# Altium PCB LASERDIODE_FIX.PcbDoc (part 1 of 4)
Units mm, origin at the board's own origin, x right, y up, seen from the top; angles counter-clockwise.
Board outline 85 x 85 mm, 4 copper layers (Top Layer, Mid-Layer 1, Mid-Layer 2, Bottom Layer); 546 components, 363 nets, 1494 pads, 1079 vias.
Unrouted connection lines stored in the file: 1020.
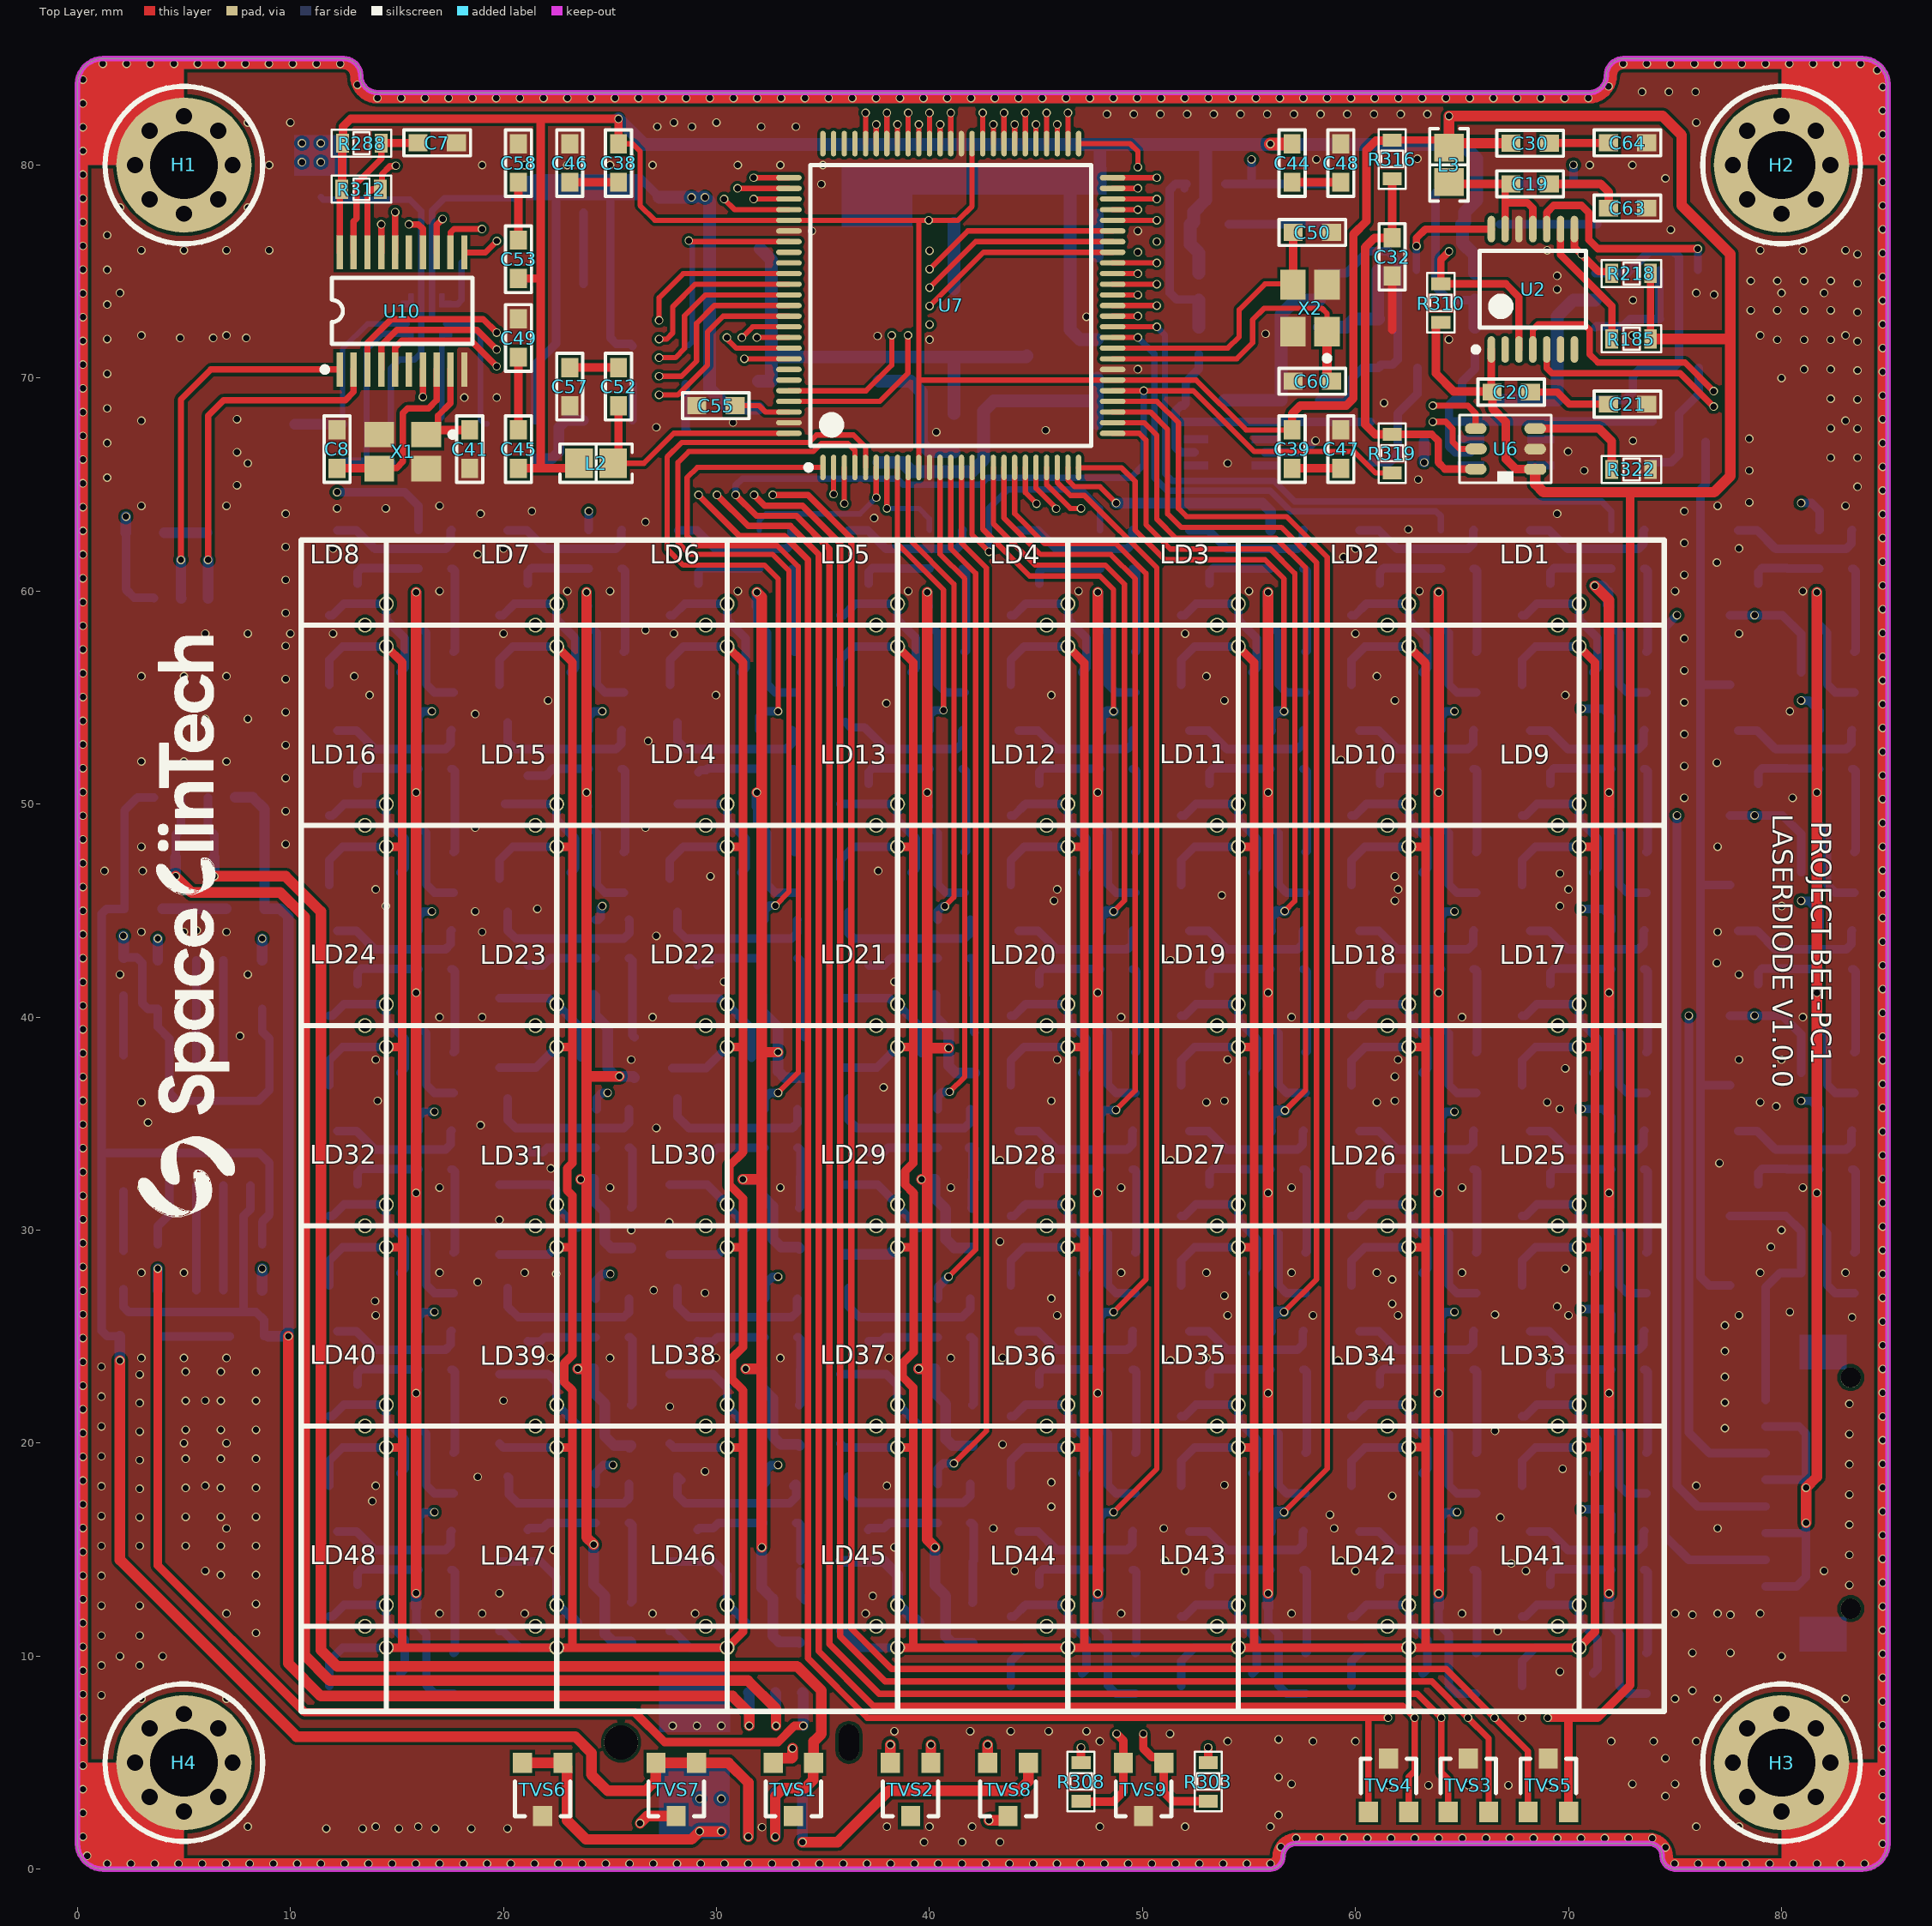
[diagram p0: Top Layer view]
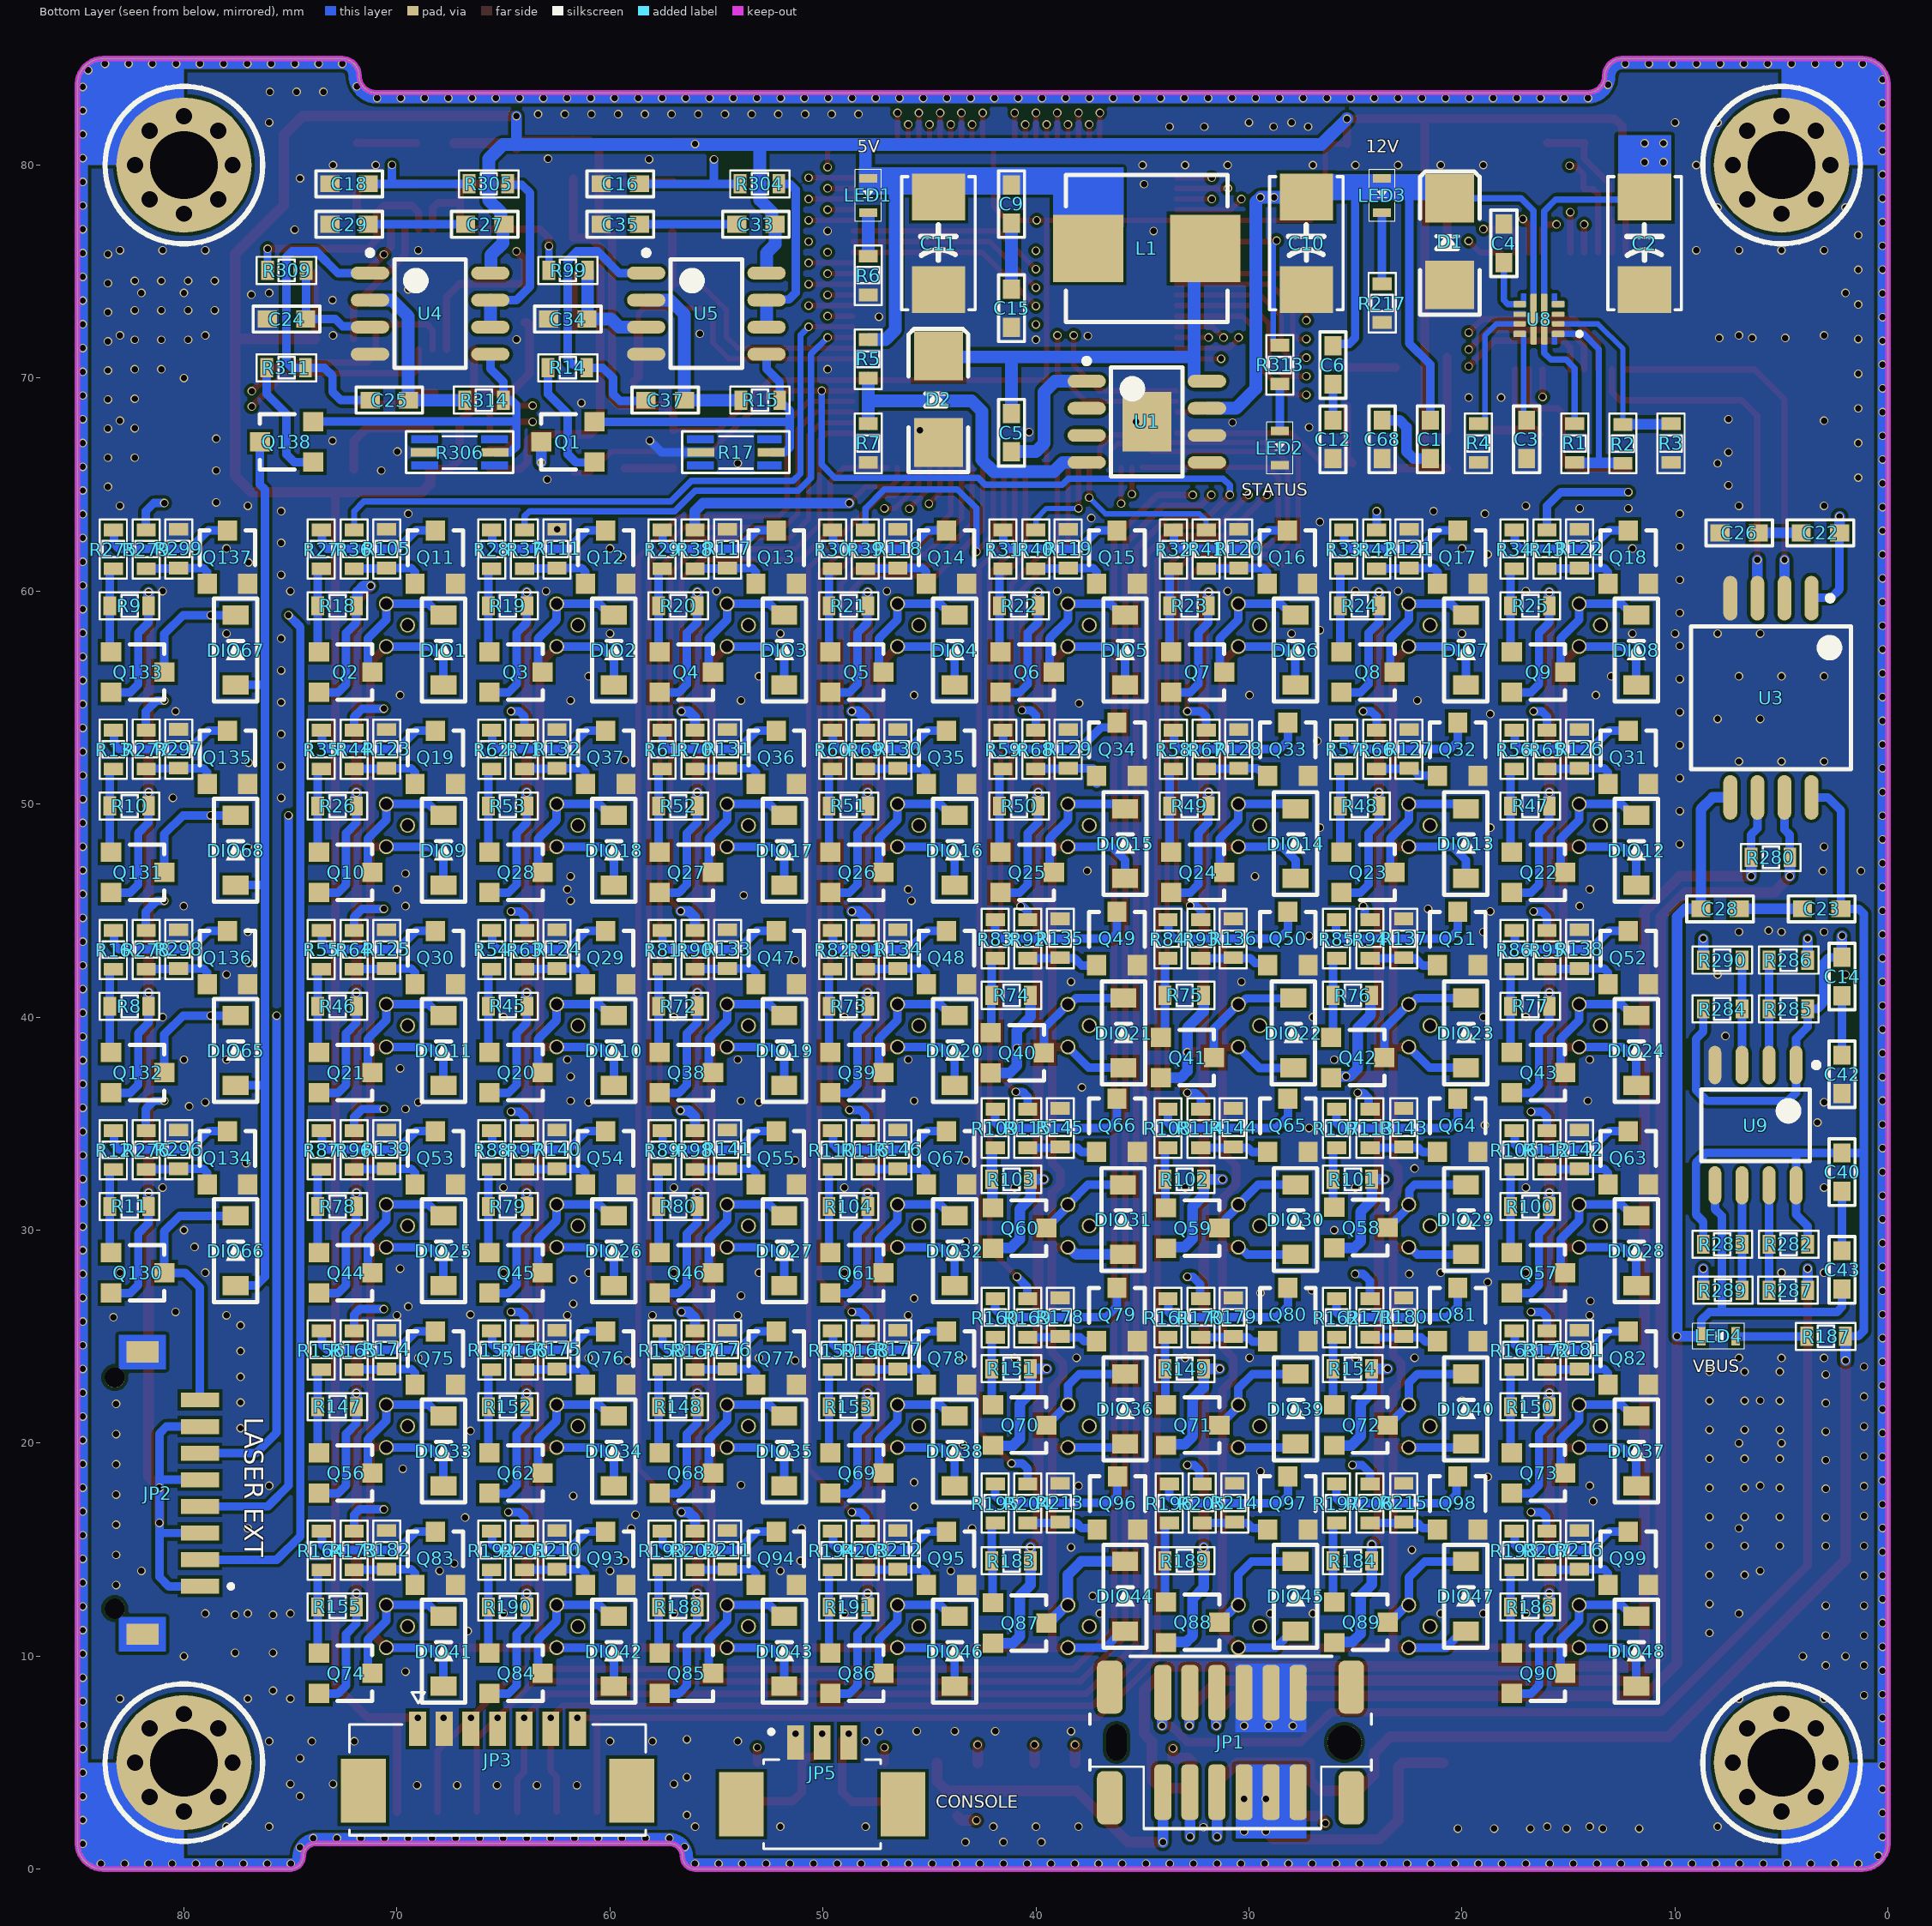
[diagram p1: Bottom Layer view, seen from below]
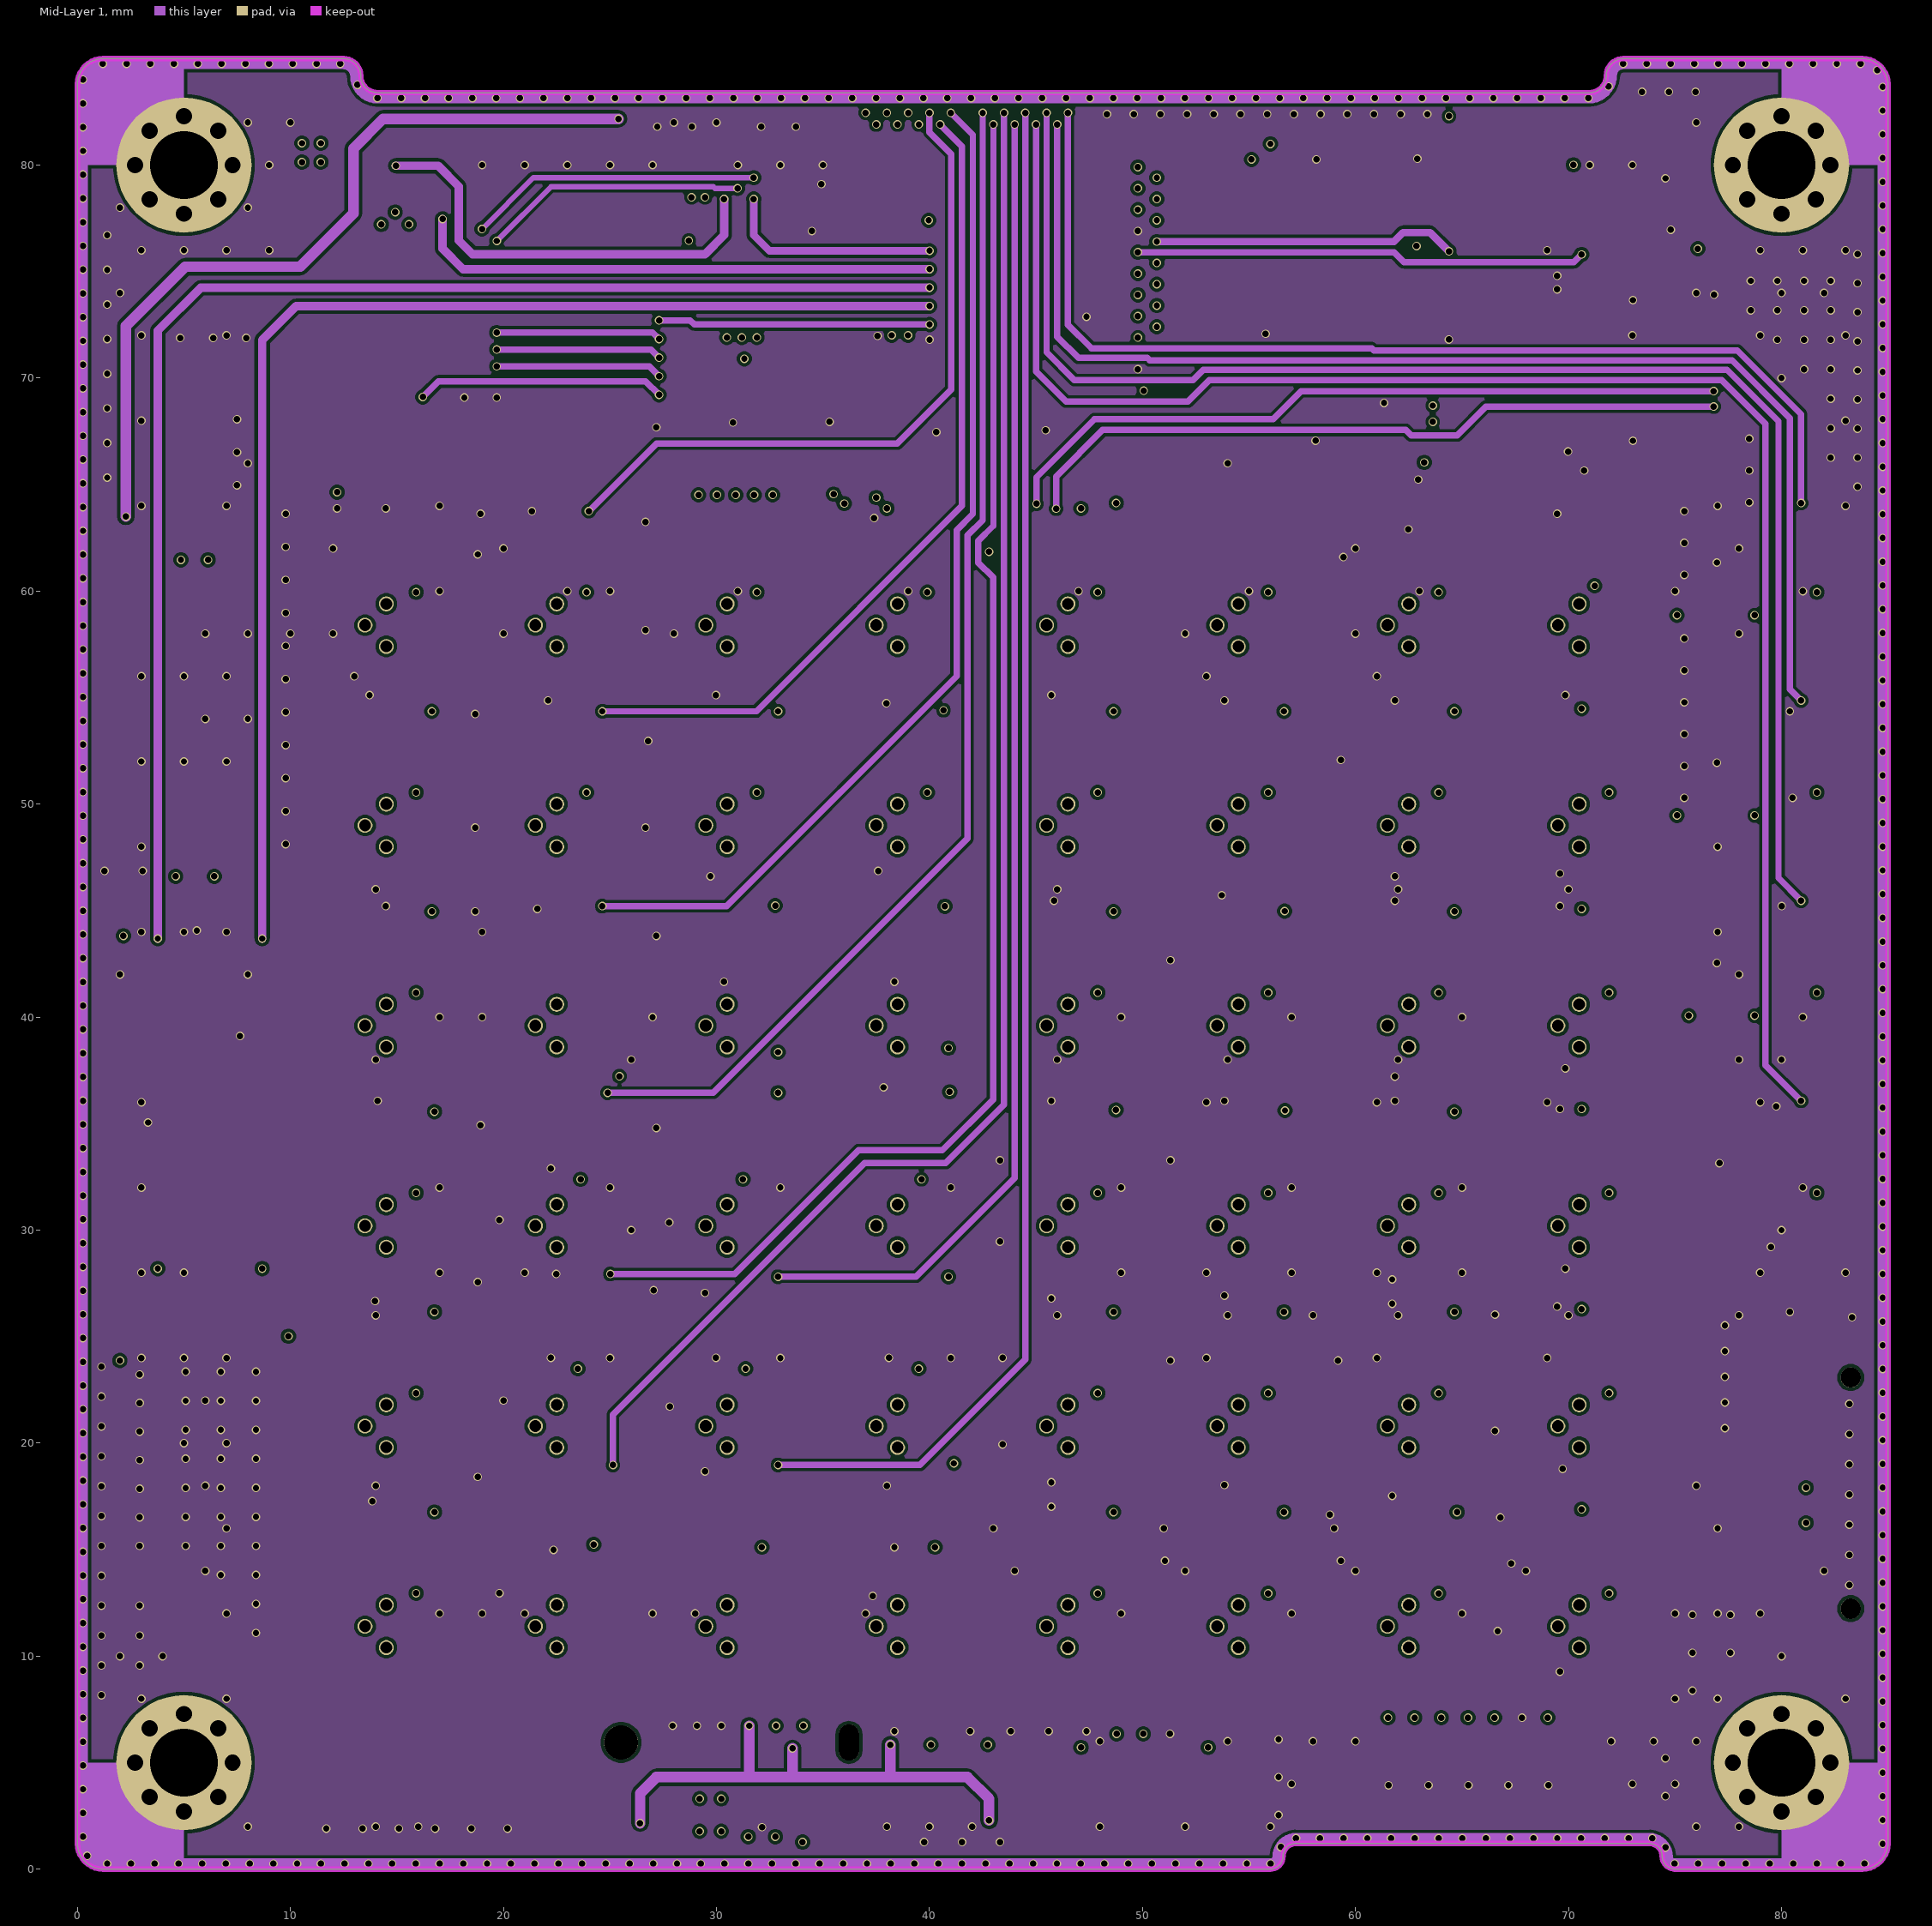
[diagram p2: Mid-Layer 1]
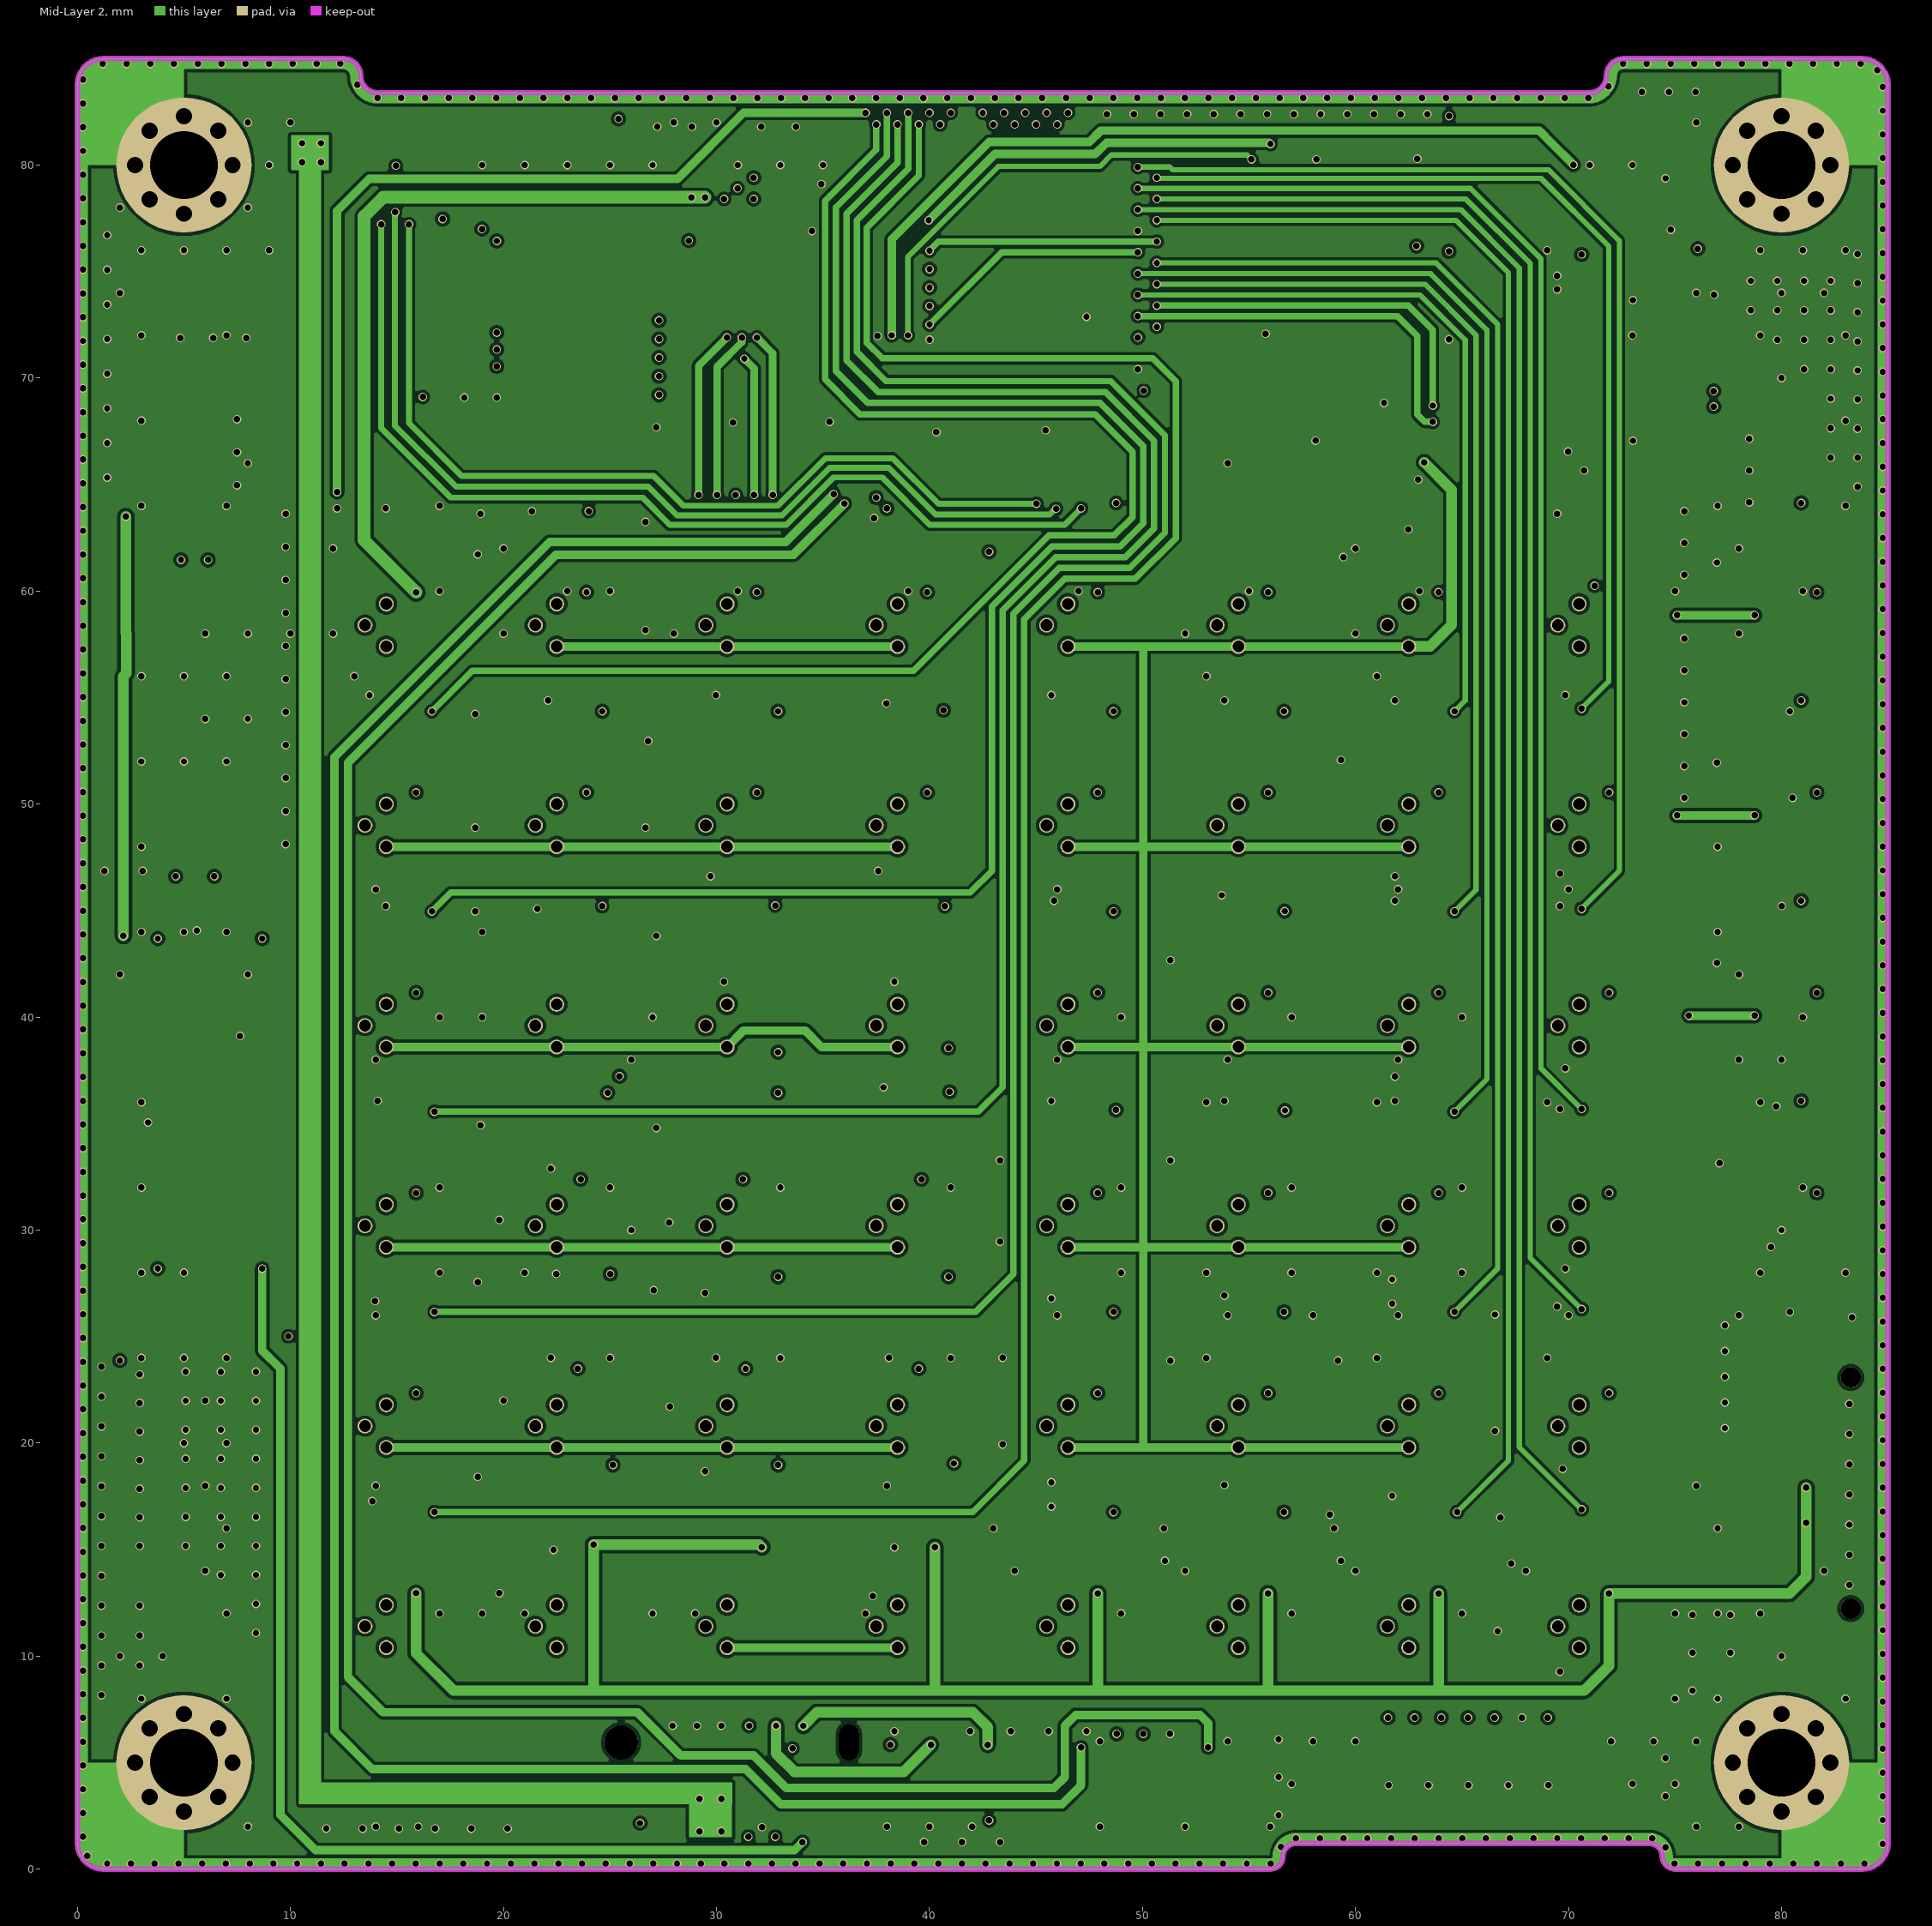
[diagram p3: Mid-Layer 2]
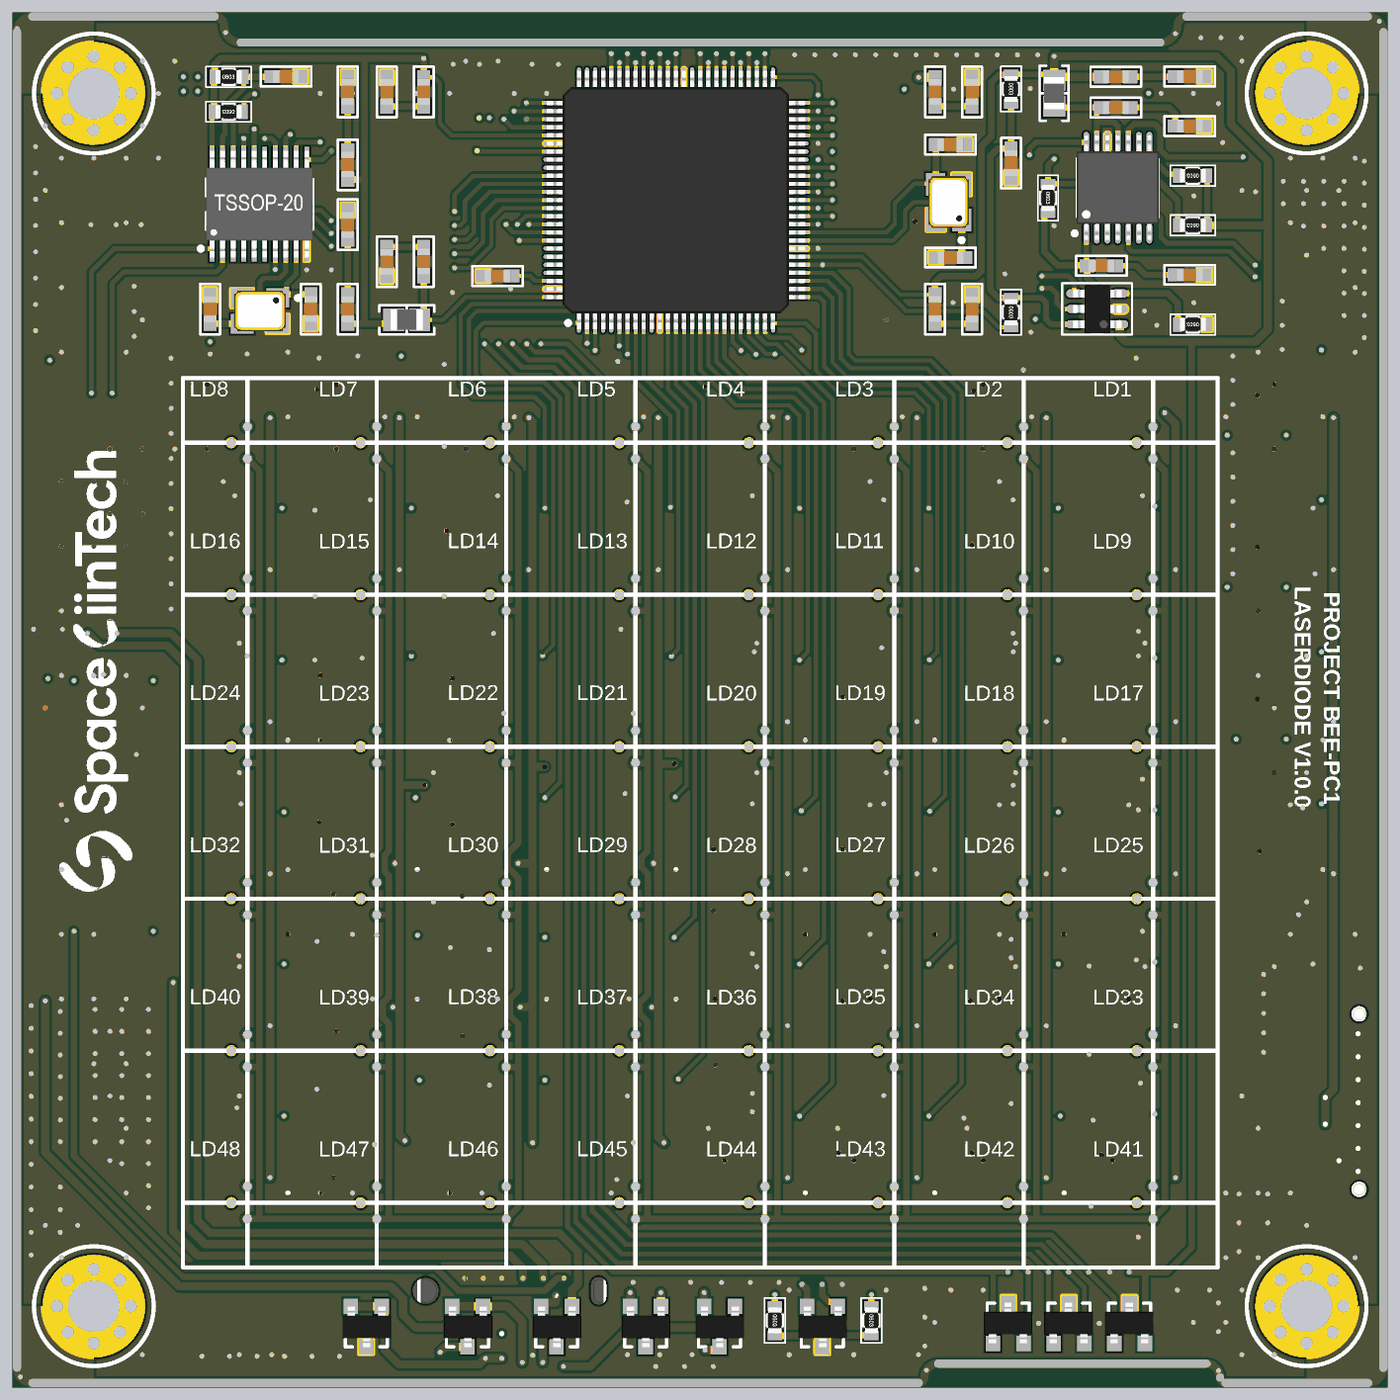
[diagram p7: 3D render of the assembled board from above, using the file's embedded part models]
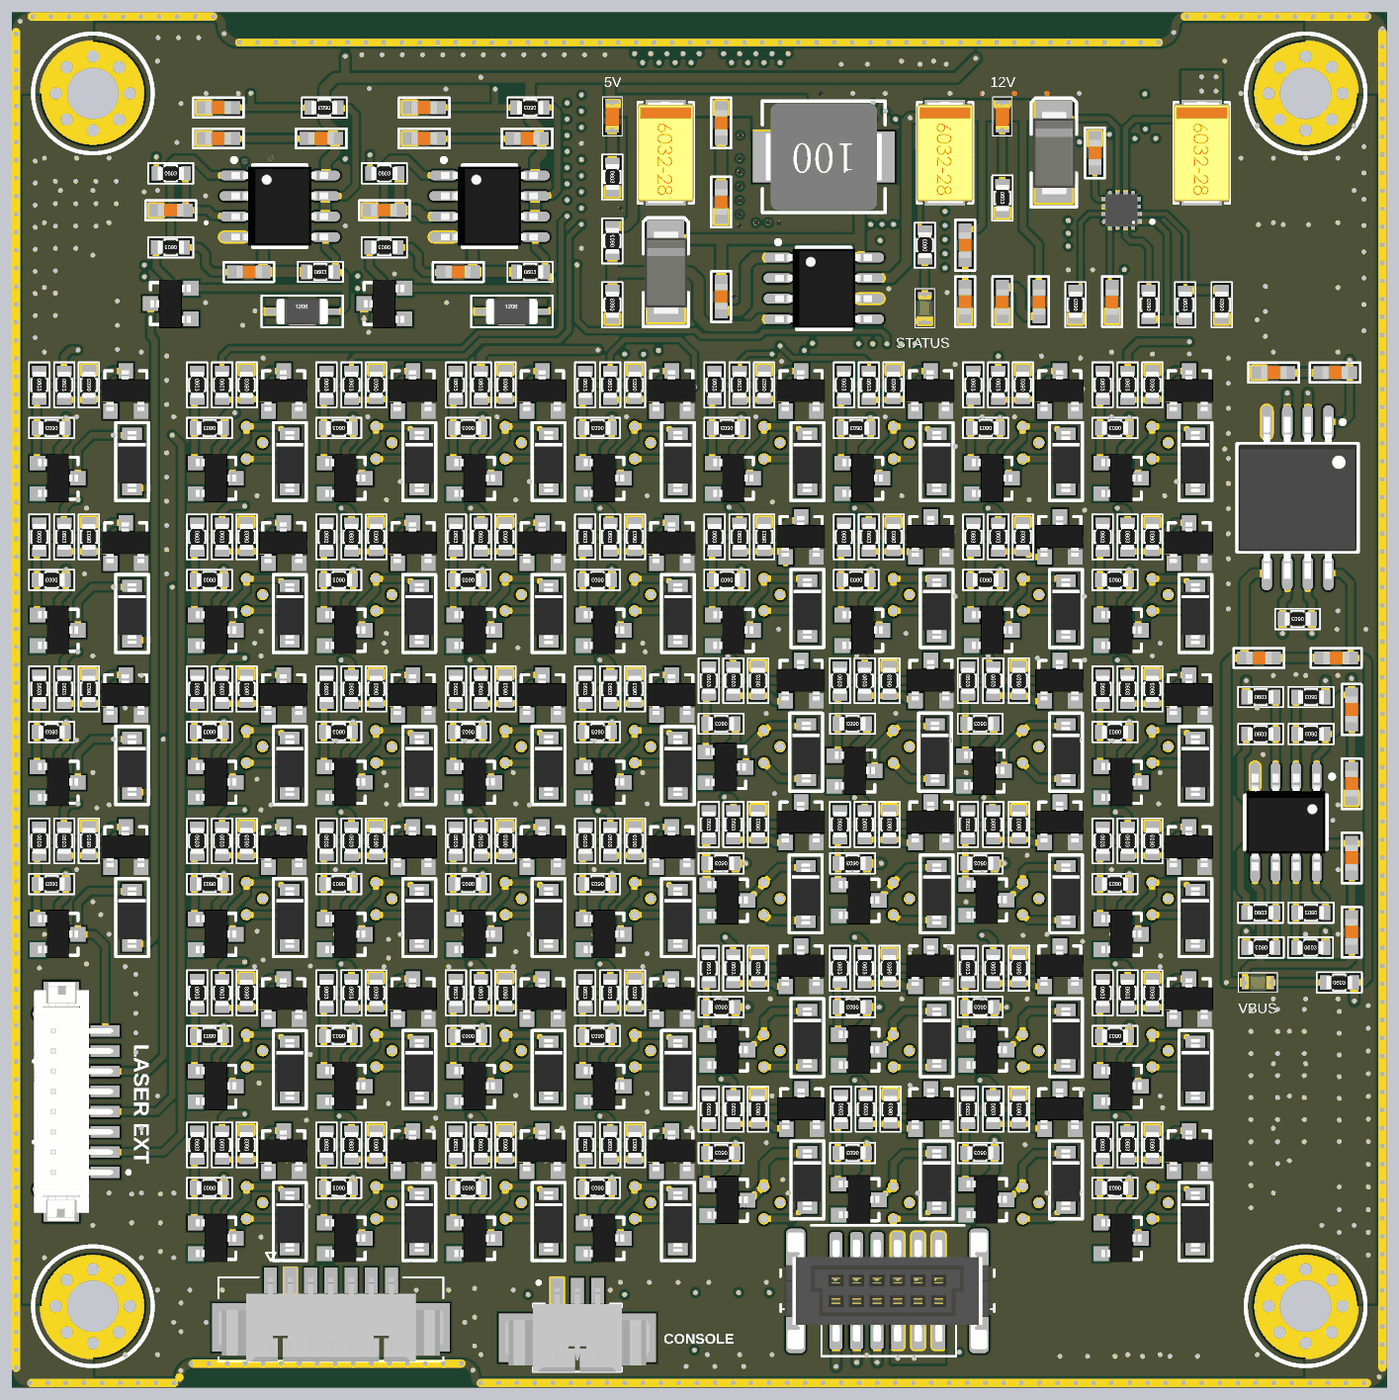
[diagram p8: 3D render of the assembled board from below, using the file's embedded part models]

## Layer stack, top to bottom
Top Solder: solder mask 0.0102, Solder Resist, Dk 3.5
Top Layer: signal copper 0.0356
Dielectric 1: dielectric 0.32, FR-4, Dk 4.8
Mid-Layer 1: signal copper 0.0356
Dielectric2: dielectric 0.32, FR-4, Dk 4.8
Mid-Layer 2: signal copper 0.0356
Dielectric3: dielectric 0.32, FR-4, Dk 4.8
Bottom Layer: signal copper 0.0356
Bottom Solder: solder mask 0.0102, Solder Resist, Dk 3.5

## Board outline
1.2,0 cw(c1.2,1.2) 0,1.2 0,83.8 cw(c1.2,83.8) 1.2,85 12.5,85 cw(c12.5,84.2) 13.3,84.2 ccw(c14.1,84.2) 14.1,83.4 56.673,83.4 56.675,83.398 70.975,83.398 ccw(c70.975,84.198) 71.775,84.198 cw(c72.575,84.198) 72.575,84.998 83.798,84.998 83.8,85 cw(c83.8,83.8) 85,83.8 85,1.2 cw(c83.8,1.2) 83.8,0 75,0 cw(c75,0.6) 74.4,0.6 ccw(c73.8,0.6) 73.8,1.2 57.2,1.2 ccw(c57.2,0.6) 56.6,0.6 cw(c56,0.6) 56,0 56.007,0

## Design rules (kind name [scope] priority, off if disabled: settings)
Clearance [NOT InNet('SHIELD') and NOT OnLayer('Keep-Out Layer')] p1: gap=0.15 ignorepadtopadclearanceinfootprint=FALSE except(0.12: SMDPad-SMDPad)
HoleSize [All] p1: absolutevalues=TRUE maxlimit=8 minlimit=0.025 maxpercent=80.000 minpercent=20.000
HoleToHoleClearance [All] p1: gap=0.15 allowstackedmicrovias=TRUE
MinimumSolderMaskSliver [All] p1: minsoldermaskwidth=0
PolygonConnect [All] p1: connectstyle=Direct reliefconductorwidth=0.254 reliefentries=4 polygonreliefangle="90 Angle" airgapwidth=0.254
RoutingVias [All] p1: holewidth=0.711 width=1.27 viastyle="Through Hole" minholewidth=0.711 minwidth=1.27 maxholewidth=0.711 maxwidth=1.27
SilkToSolderMaskClearance [IsPad] p1: minsilkscreentomaskgap=0 clearancetoexposedcopper=TRUE
SolderMaskExpansion [All] p1: expansion=0.102 istentingtop=FALSE
Width [All] p1: maxlimit=3 minlimit=0.2 preferedwidth=0.254 minimp=50.000000 maximp=50.000000 favimp=50.000000
26 further rules are at their usual default settings.

## Classes and differential pairs
component class MCU: C32 C38 C39 C44 C45 C46 C47 C48 C49 C50 C52 C53 C55 C57 C58 C60 JP3 JP5 L2 LED2 R303 R308 R313 R316 R319 R322 TVS3 TVS4 TVS5 TVS9 U6 U7 X2
component class SWITCHING: DIO1 DIO2 DIO3 DIO4 DIO5 DIO6 DIO7 DIO8 DIO9 DIO10 DIO11 DIO12 DIO13 DIO14 DIO15 DIO16 DIO17 DIO18 DIO19 DIO20 DIO21 DIO22 DIO23 DIO24 DIO25 DIO26 DIO27 DIO28 DIO29 DIO30 DIO31 DIO32 DIO65 DIO66 DIO67 DIO68 LD1 LD2 LD3 LD4 LD5 LD6 LD7 LD8 LD9 LD10 LD11 LD12 LD13 LD14 LD15 LD16 LD17 LD18 LD19 LD20 LD21 LD22 LD23 LD24 LD25 LD26 LD27 LD28 LD29 LD30 LD31 LD32 Q2 Q3 Q4 Q5 Q6 Q7 Q8 Q9 Q10 Q11 Q12 Q13 Q14 Q15 Q16 Q17 Q18 Q19 Q20 Q21 Q22 Q23 Q24 Q25 Q26 Q27 Q28 Q29 Q30 Q31 Q32 Q33 Q34 Q35 Q36 Q37 Q38 Q39 Q40 Q41 Q42 Q43 Q44 Q45 Q46 Q47 Q48 Q49 Q50 Q51 Q52 Q53 Q54 Q55 Q57 Q58 Q59 Q60 Q61 Q63 Q64 Q65 Q66 Q67 Q130 Q131 Q132 Q133 Q134 Q135 Q136 Q137 R8 R9 R10 R11 R12 R13 R16 R18 R19 R20 R21 R22 R23 R24 R25 R26 R27 R28 R29 R30 R31 R32 R33 R34 R35 R36 R37 R38 R39 R40 R41 R42 R43 R44 R45 R46 R47 R48 R49 R50 R51 R52 R53 R54 R55 R56 R57 R58 R59 R60 R61 R62 R63 R64 R65 R66 R67 R68 R69 R70 R71 R72 R73 R74 R75 R76 R77 R78 R79 R80 R81 R82 R83 R84 R85 R86 R87 R88 R89 R90 R91 R92 R93 R94 R95 R96 R97 R98 R100 R101 R102 R103 R104 R105 R106 R107 R108 R109 R110 R111 R112 R113 R114 R115 R116 R117 R118 R119 R120 R121 R122 R123 R124 R125 R126 R127 R128 R129 R130 R131 R132 R133 R134 R135 R136 R137 R138 R139 R140 R141 R142 R143 R144 R145 R146 R275 R276 R277 R278 R279 R296 R297 R298 R299
component class "SWITCHING (CONT)": DIO33 DIO34 DIO35 DIO36 DIO37 DIO38 DIO39 DIO40 DIO41 DIO42 DIO43 DIO44 DIO45 DIO46 DIO47 DIO48 LD33 LD34 LD35 LD36 LD37 LD38 LD39 LD40 LD41 LD42 LD43 LD44 LD45 LD46 LD47 LD48 Q56 Q62 Q68 Q69 Q70 Q71 Q72 Q73 Q74 Q75 Q76 Q77 Q78 Q79 Q80 Q81 Q82 Q83 Q84 Q85 Q86 Q87 Q88 Q89 Q90 Q93 Q94 Q95 Q96 Q97 Q98 Q99 R147 R148 R149 R150 R151 R152 R153 R154 R155 R156 R157 R158 R159 R160 R161 R162 R163 R164 R165 R166 R167 R168 R169 R170 R171 R172 R173 R174 R175 R176 R177 R178 R179 R180 R181 R182 R183 R184 R186 R188 R189 R190 R191 R192 R193 R194 R195 R196 R197 R198 R201 R202 R203 R204 R205 R206 R207 R210 R211 R212 R213 R214 R215 R216
component class EFUSE_AND_REGULATOR: C1 C2 C3 C4 C5 C6 C9 C10 C11 C12 C15 C68 D1 D2 L1 LED1 LED3 R1 R2 R3 R4 R5 R6 R7 R217 U1 U8
component class CURRENT_SOURCE: C16 C18 C24 C25 C27 C29 C33 C34 C35 C37 Q1 Q138 R14 R15 R17 R99 R304 R305 R306 R309 R311 R314 U4 U5
component class COMMUNICATION: C7 C8 C14 C19 C20 C21 C22 C23 C26 C28 C30 C40 C41 C42 C43 C63 C64 H1 H2 H3 H4 JP1 JP2 L3 LED4 R185 R187 R218 R280 R282 R283 R284 R285 R286 R287 R288 R289 R290 R310 R312 TVS1 TVS2 TVS6 TVS7 TVS8 U2 U3 U9 U10 X1

## Components (designator, comment, footprint, x,y, rotation, side; value= is the part's Value field where it differs from the comment)
C1 "0.22uF/25V" SM-0603 21.488,67.12 r90 bottom value=103
C2 "100uF/16V" "TANT 2312" 11.43,76.327 r270 bottom
C3 "2.2nF/25V" SM-0603 16.967,67.12 r90 bottom value=103
C4 "2.2nF/25V" SM-0603 18.034,76.327 r270 bottom value=103
C5 "0.01uF/25V" SM-0603 41.148,67.437 r270 bottom value=103
C6 "0.22uF/25V" SM-0603 26.06,70.612 r270 bottom value=103
C7 "0.22uF/25V" SM-0603 16.891,81.045 r0 top value=103
C8 "12pF/25V" SM-0603 12.192,66.664 r90 top value=103
C9 "0.22uF/25V" SM-0603 41.148,78.168 r270 bottom value=103
C10 "100uF/16V" "TANT 2312" 27.305,76.327 r270 bottom
C11 "100uF/16V" "TANT 2312" 44.577,76.327 r270 bottom
C12 "0.22uF/25V" SM-0603 26.06,67.12 r270 bottom value=103
C14 "0.22uF/25V" SM-0603 2.159,41.905 r270 bottom value=103
C15 "0.22uF/25V" SM-0603 41.148,73.279 r270 bottom value=103
C16 "470pF/50V" SM-0603 59.514,79.122 r180 bottom value=103
C18 "470pF/50V" SM-0603 72.242,79.122 r180 bottom value=103
C19 "0.22uF/25V" SM-0603 68.199,79.121 r180 top value=103
C20 "0.22uF/25V" SM-0603 67.31,69.342 r180 top value=103
C21 "0.22uF/25V" SM-0603 72.771,68.779 r180 top value=103
C22 "0.22uF/25V" SM-0603 3.175,62.736 r0 bottom value=103
C23 "0.22uF/25V" SM-0603 3.111,45.085 r0 bottom value=103
C24 "470pF/50V" SM-0603 75.184,72.771 r180 bottom value=103
C25 "0.1uF/25V" SM-0603 70.358,68.961 r0 bottom value=103
C26 "0.22uF/25V" SM-0603 6.985,62.736 r0 bottom value=103
C27 "0.22uF/25V" SM-0603 65.878,77.216 r180 bottom value=103
C28 "0.22uF/25V" SM-0603 7.885,45.085 r0 bottom value=103
C29 "0.22uF/25V" SM-0603 72.242,77.216 r180 bottom value=103
C30 "0.22uF/25V" SM-0603 68.199,81.026 r180 top value=103
C32 "0.22uF/25V" SM-0603 61.722,75.692 r270 top value=103
C33 "0.22uF/25V" SM-0603 53.15,77.216 r180 bottom value=103
C34 "470pF/50V" SM-0603 61.976,72.771 r180 bottom value=103
C35 "0.22uF/25V" SM-0603 59.514,77.216 r180 bottom value=103
C37 "0.1uF/25V" SM-0603 57.404,68.961 r0 bottom value=103
C38 "0.22uF/25V" SM-0603 25.4,80.093 r270 top value=103
C39 "0.22uF/25V" SM-0603 57.023,66.664 r270 top value=103
C40 "0.22uF/25V" SM-0603 2.159,32.723 r270 bottom value=103
C41 "12pF/25V" SM-0603 18.415,66.664 r270 top value=103
C42 "0.22uF/25V" SM-0603 2.159,37.314 r270 bottom value=103
C43 "0.22uF/25V" SM-0603 2.159,28.131 r270 bottom value=103
C44 "0.22uF/25V" SM-0603 57.023,80.093 r270 top value=103
C45 "0.22uF/25V" SM-0603 20.701,66.664 r90 top value=103
C46 "0.22uF/25V" SM-0603 23.114,80.093 r90 top value=103
C47 "0.22uF/25V" SM-0603 59.309,66.664 r90 top value=103
C48 "0.22uF/25V" SM-0603 59.309,80.093 r90 top value=103
C49 "0.22uF/25V" SM-0603 20.701,71.882 r90 top value=103
C50 "12pF/25V" SM-0603 57.975,76.835 r0 top value=103
C52 "0.22uF/25V" SM-0603 25.4,69.596 r270 top value=103
C53 "0.22uF/25V" SM-0603 20.701,75.576 r270 top value=103
C55 "0.22uF/25V" SM-0603 29.972,68.707 r0 top value=103
C57 "0.22uF/25V" SM-0603 23.114,69.596 r90 top value=103
C58 "0.22uF/25V" SM-0603 20.701,80.093 r270 top value=103
C60 "12pF/25V" SM-0603 57.975,69.85 r180 top value=103
C63 "0.22uF/25V" SM-0603 72.771,77.979 r180 top value=103
C64 "0.22uF/25V" SM-0603 72.771,81.045 r180 top value=103
C68 "0.22uF/25V" SM-0603 23.749,67.12 r90 bottom value=103
D1 "SS54" DIO-SMD-A 20.701,76.278 r270 bottom value=1N5007
D2 "SS54" DIO-SMD-A 44.704,68.884 r270 bottom value=1N5007
DIO1 "Diode SMD" SOD23 67.818,55.581 r90 bottom value=1N5007
DIO2 "Diode SMD" SOD23 59.818,55.581 r90 bottom value=1N5007
DIO3 "Diode SMD" SOD23 51.818,55.581 r90 bottom value=1N5007
DIO4 "Diode SMD" SOD23 43.818,55.581 r90 bottom value=1N5007
DIO5 "Diode SMD" SOD23 35.818,55.581 r90 bottom value=1N5007
DIO6 "Diode SMD" SOD23 27.818,55.581 r90 bottom value=1N5007
DIO7 "Diode SMD" SOD23 19.818,55.581 r90 bottom value=1N5007
DIO8 "Diode SMD" SOD23 11.818,55.581 r90 bottom value=1N5007
DIO9 "Diode SMD" SOD23 67.818,46.181 r90 bottom value=1N5007
DIO10 "Diode SMD" SOD23 59.818,36.781 r90 bottom value=1N5007
DIO11 "Diode SMD" SOD23 67.818,36.781 r90 bottom value=1N5007
DIO12 "Diode SMD" SOD23 11.818,46.181 r90 bottom value=1N5007
DIO13 "Diode SMD" SOD23 19.818,46.498 r90 bottom value=1N5007
DIO14 "Diode SMD" SOD23 27.813,46.498 r90 bottom value=1N5007
DIO15 "Diode SMD" SOD23 35.818,46.498 r90 bottom value=1N5007
DIO16 "Diode SMD" SOD23 43.818,46.181 r90 bottom value=1N5007
DIO17 "Diode SMD" SOD23 51.818,46.181 r90 bottom value=1N5007
DIO18 "Diode SMD" SOD23 59.818,46.181 r90 bottom value=1N5007
DIO19 "Diode SMD" SOD23 51.818,36.781 r90 bottom value=1N5007
DIO20 "Diode SMD" SOD23 43.818,36.781 r90 bottom value=1N5007
DIO21 "Diode SMD" SOD23 35.896,37.608 r90 bottom value=1N5007
DIO22 "Diode SMD" SOD23 27.918,37.608 r90 bottom value=1N5007
DIO23 "Diode SMD" SOD23 19.818,37.608 r90 bottom value=1N5007
DIO24 "Diode SMD" SOD23 11.818,36.781 r90 bottom value=1N5007
DIO25 "Diode SMD" SOD23 67.818,27.381 r90 bottom value=1N5007
DIO26 "Diode SMD" SOD23 59.818,27.381 r90 bottom value=1N5007
DIO27 "Diode SMD" SOD23 51.818,27.381 r90 bottom value=1N5007
DIO28 "Diode SMD" SOD23 11.818,27.381 r90 bottom value=1N5007
DIO29 "Diode SMD" SOD23 19.818,28.845 r90 bottom value=1N5007
DIO30 "Diode SMD" SOD23 27.813,28.845 r90 bottom value=1N5007
DIO31 "Diode SMD" SOD23 35.918,28.845 r90 bottom value=1N5007
DIO32 "Diode SMD" SOD23 43.818,27.381 r90 bottom value=1N5007
DIO33 "Diode SMD" SOD23 67.818,17.981 r90 bottom value=1N5007
DIO34 "Diode SMD" SOD23 59.818,17.981 r90 bottom value=1N5007
DIO35 "Diode SMD" SOD23 51.818,17.981 r90 bottom value=1N5007
DIO36 "Diode SMD" SOD23 35.818,19.955 r90 bottom value=1N5007
DIO37 "Diode SMD" SOD23 11.818,17.981 r90 bottom value=1N5007
DIO38 "Diode SMD" SOD23 43.818,17.981 r90 bottom value=1N5007
DIO39 "Diode SMD" SOD23 27.813,19.955 r90 bottom value=1N5007
DIO40 "Diode SMD" SOD23 19.818,19.955 r90 bottom value=1N5007
DIO41 "Diode SMD" SOD23 67.818,8.581 r90 bottom value=1N5007
DIO42 "Diode SMD" SOD23 59.818,8.581 r90 bottom value=1N5007
DIO43 "Diode SMD" SOD23 51.818,8.581 r90 bottom value=1N5007
DIO44 "Diode SMD" SOD23 35.818,11.16 r90 bottom value=1N5007
DIO45 "Diode SMD" SOD23 27.813,11.16 r90 bottom value=1N5007
DIO46 "Diode SMD" SOD23 43.818,8.581 r90 bottom value=1N5007
DIO47 "Diode SMD" SOD23 19.818,11.16 r90 bottom value=1N5007
DIO48 "Diode SMD" SOD23 11.818,8.581 r90 bottom value=1N5007
DIO65 "Diode SMD" SOD23 77.578,36.781 r90 bottom value=1N5007
DIO66 "Diode SMD" SOD23 77.578,27.381 r90 bottom value=1N5007
DIO67 "Diode SMD" SOD23 77.578,55.581 r90 bottom value=1N5007
DIO68 "Diode SMD" SOD23 77.578,46.182 r90 bottom value=1N5007
H1 "M3" M3 5,80 r0 top locked
H2 "M3" M3 80,80 r0 top locked
H3 "M3" M3 80,5 r0 top locked
H4 "M3" M3 5,5 r0 top locked
JP1 "JP6x2" M55-6001242R 30.868,5.948 r180 bottom locked
JP2 "LASER_EXTERNAL" M30-6000846 81.947,17.653 r90 bottom
JP3 "JTAG" 0532610771 65.278,4.191 r180 bottom locked
JP5 "CONSOLE" 0532610371 50.038,3.048 r180 bottom locked
L1 "15uH/3.5A" SRP7050TA 34.798,76.082 r0 bottom
L2 "10uH" "FER 0805/2012" 24.35,66.001 r180 top value=1.5uH
L3 "10uH" "FER 0805/2012" 64.389,80.01 r90 top value=1.5uH
LD1 "LaserDiode" LASER 70.5,58.4 r0 top
LD2 "LaserDiode" LASER 62.5,58.4 r0 top
LD3 "LaserDiode" LASER 54.5,58.4 r0 top
LD4 "LaserDiode" LASER 46.5,58.4 r0 top
LD5 "LaserDiode" LASER 38.5,58.4 r0 top
LD6 "LaserDiode" LASER 30.5,58.4 r0 top
LD7 "LaserDiode" LASER 22.5,58.4 r0 top
LD8 "LaserDiode" LASER 14.5,58.4 r0 top
LD9 "LaserDiode" LASER 70.5,49 r0 top
LD10 "LaserDiode" LASER 62.5,49 r0 top
LD11 "LaserDiode" LASER 54.5,49 r0 top
LD12 "LaserDiode" LASER 46.5,49 r0 top
LD13 "LaserDiode" LASER 38.5,49 r0 top
LD14 "LaserDiode" LASER 30.5,49 r0 top
LD15 "LaserDiode" LASER 22.5,49 r0 top
LD16 "LaserDiode" LASER 14.5,49 r0 top
LD17 "LaserDiode" LASER 70.5,39.6 r0 top
LD18 "LaserDiode" LASER 62.5,39.6 r0 top
LD19 "LaserDiode" LASER 54.5,39.6 r0 top
LD20 "LaserDiode" LASER 46.5,39.6 r0 top
LD21 "LaserDiode" LASER 38.5,39.6 r0 top
LD22 "LaserDiode" LASER 30.5,39.6 r0 top
LD23 "LaserDiode" LASER 22.5,39.6 r0 top
LD24 "LaserDiode" LASER 14.5,39.6 r0 top
LD25 "LaserDiode" LASER 70.5,30.2 r0 top
LD26 "LaserDiode" LASER 62.5,30.2 r0 top
LD27 "LaserDiode" LASER 54.5,30.2 r0 top
LD28 "LaserDiode" LASER 46.5,30.2 r0 top
LD29 "LaserDiode" LASER 38.5,30.2 r0 top
LD30 "LaserDiode" LASER 30.5,30.2 r0 top
LD31 "LaserDiode" LASER 22.5,30.2 r0 top
LD32 "LaserDiode" LASER 14.5,30.2 r0 top
LD33 "LaserDiode" LASER 70.5,20.8 r0 top
LD34 "LaserDiode" LASER 62.5,20.8 r0 top
LD35 "LaserDiode" LASER 54.5,20.8 r0 top
LD36 "LaserDiode" LASER 46.5,20.8 r0 top
LD37 "LaserDiode" LASER 38.5,20.8 r0 top
LD38 "LaserDiode" LASER 30.5,20.8 r0 top
LD39 "LaserDiode" LASER 22.5,20.8 r0 top
LD40 "LaserDiode" LASER 14.5,20.8 r0 top
LD41 "LaserDiode" LASER 70.5,11.4 r0 top
LD42 "LaserDiode" LASER 62.5,11.4 r0 top
LD43 "LaserDiode" LASER 54.5,11.4 r0 top
LD44 "LaserDiode" LASER 46.5,11.4 r0 top
LD45 "LaserDiode" LASER 38.5,11.4 r0 top
LD46 "LaserDiode" LASER 30.5,11.4 r0 top
LD47 "LaserDiode" LASER 22.5,11.4 r0 top
LD48 "LaserDiode" LASER 14.5,11.4 r0 top
LED1 "LED" REDLED_0603 47.879,78.572 r270 bottom value="LED 3 - 5 ly 2 Colour"
LED2 "LED_STATUS" GREENLED_0603 28.555,66.717 r270 bottom value="LED 3 - 5 ly 2 Colour"
LED3 "LED" REDLED_0603 23.754,78.572 r270 bottom value="LED 3 - 5 ly 2 Colour"
LED4 "LED_VBUS" GREENLED_0603 7.959,25.019 r0 bottom value="LED 3 - 5 ly 2 Colour"
Q1 "AO3400" SOT23-132 61.976,67.006 r90 bottom
Q2 "AO3401" SOT23-123 72.41,56.195 r270 bottom
Q3 "AO3401" SOT23-123 64.41,56.195 r270 bottom
Q4 "AO3401" SOT23-123 56.41,56.195 r270 bottom
Q5 "AO3401" SOT23-123 48.41,56.195 r270 bottom
Q6 "AO3401" SOT23-123 40.41,56.195 r270 bottom
Q7 "AO3401" SOT23-123 32.41,56.195 r270 bottom
Q8 "AO3401" SOT23-123 24.41,56.195 r270 bottom
Q9 "AO3401" SOT23-123 16.41,56.195 r270 bottom
Q10 "AO3401" SOT23-123 72.41,46.795 r270 bottom
Q11 "MMBT2222A" SOT23-132 68.199,61.595 r180 bottom value=C1815
Q12 "MMBT2222A" SOT23-132 60.199,61.595 r180 bottom value=C1815
Q13 "MMBT2222A" SOT23-132 52.199,61.595 r180 bottom value=C1815
Q14 "MMBT2222A" SOT23-132 44.199,61.595 r180 bottom value=C1815
Q15 "MMBT2222A" SOT23-132 36.199,61.595 r180 bottom value=C1815
Q16 "MMBT2222A" SOT23-132 28.199,61.595 r180 bottom value=C1815
Q17 "MMBT2222A" SOT23-132 20.199,61.595 r180 bottom value=C1815
Q18 "MMBT2222A" SOT23-132 12.199,61.595 r180 bottom value=C1815
Q19 "MMBT2222A" SOT23-132 68.199,52.195 r180 bottom value=C1815
Q20 "AO3401" SOT23-123 64.41,37.395 r270 bottom
Q21 "AO3401" SOT23-123 72.41,37.395 r270 bottom
Q22 "AO3401" SOT23-123 16.41,46.795 r270 bottom
Q23 "AO3401" SOT23-123 24.41,46.795 r270 bottom
Q24 "AO3401" SOT23-123 32.41,46.795 r270 bottom
Q25 "AO3401" SOT23-123 40.41,46.795 r270 bottom
Q26 "AO3401" SOT23-123 48.41,46.795 r270 bottom
Q27 "AO3401" SOT23-123 56.41,46.795 r270 bottom
Q28 "AO3401" SOT23-123 64.41,46.795 r270 bottom
Q29 "MMBT2222A" SOT23-132 60.199,42.795 r180 bottom value=C1815
Q30 "MMBT2222A" SOT23-132 68.199,42.795 r180 bottom value=C1815
Q31 "MMBT2222A" SOT23-132 12.199,52.195 r180 bottom value=C1815
Q32 "MMBT2222A" SOT23-132 20.199,52.578 r180 bottom value=C1815
Q33 "MMBT2222A" SOT23-132 28.173,52.578 r180 bottom value=C1815
Q34 "MMBT2222A" SOT23-132 36.199,52.578 r180 bottom value=C1815
Q35 "MMBT2222A" SOT23-132 44.199,52.195 r180 bottom value=C1815
Q36 "MMBT2222A" SOT23-132 52.199,52.195 r180 bottom value=C1815
Q37 "MMBT2222A" SOT23-132 60.199,52.195 r180 bottom value=C1815
Q38 "AO3401" SOT23-123 56.41,37.395 r270 bottom
Q39 "AO3401" SOT23-123 48.41,37.395 r270 bottom
Q40 "AO3401" SOT23-123 40.875,38.32 r270 bottom
Q41 "AO3401" SOT23-123 32.893,38.1 r270 bottom
Q42 "AO3401" SOT23-123 24.898,38.105 r270 bottom
Q43 "AO3401" SOT23-123 16.41,37.395 r270 bottom
Q44 "AO3401" SOT23-123 72.41,27.995 r270 bottom
Q45 "AO3401" SOT23-123 64.41,27.995 r270 bottom
Q46 "AO3401" SOT23-123 56.41,27.995 r270 bottom
Q47 "MMBT2222A" SOT23-132 52.199,42.795 r180 bottom value=C1815
Q48 "MMBT2222A" SOT23-132 44.199,42.795 r180 bottom value=C1815
Q49 "MMBT2222A" SOT23-132 36.199,43.688 r180 bottom value=C1815
Q50 "MMBT2222A" SOT23-132 28.173,43.688 r180 bottom value=C1815
Q51 "MMBT2222A" SOT23-132 20.199,43.688 r180 bottom value=C1815
Q52 "MMBT2222A" SOT23-132 12.199,42.795 r180 bottom value=C1815
Q53 "MMBT2222A" SOT23-132 68.199,33.395 r180 bottom value=C1815
Q54 "MMBT2222A" SOT23-132 60.199,33.395 r180 bottom value=C1815
Q55 "MMBT2222A" SOT23-132 52.199,33.395 r180 bottom value=C1815
Q56 "AO3401" SOT23-123 72.41,18.595 r270 bottom
Q57 "AO3401" SOT23-123 16.41,27.995 r270 bottom
Q58 "AO3401" SOT23-123 24.745,30.12 r270 bottom
Q59 "AO3401" SOT23-123 32.639,30.099 r270 bottom
Q60 "AO3401" SOT23-123 40.767,30.099 r270 bottom
Q61 "AO3401" SOT23-123 48.41,27.995 r270 bottom
Q62 "AO3401" SOT23-123 64.41,18.595 r270 bottom
Q63 "MMBT2222A" SOT23-132 12.199,33.395 r180 bottom value=C1815
Q64 "MMBT2222A" SOT23-132 20.199,34.925 r180 bottom value=C1815
Q65 "MMBT2222A" SOT23-132 28.173,34.925 r180 bottom value=C1815
Q66 "MMBT2222A" SOT23-132 36.199,34.925 r180 bottom value=C1815
Q67 "MMBT2222A" SOT23-132 44.199,33.395 r180 bottom value=C1815
Q68 "AO3401" SOT23-123 56.41,18.595 r270 bottom
Q69 "AO3401" SOT23-123 48.41,18.595 r270 bottom
Q70 "AO3401" SOT23-123 40.767,20.843 r270 bottom
Q71 "AO3401" SOT23-123 32.639,20.843 r270 bottom
Q72 "AO3401" SOT23-123 24.745,20.843 r270 bottom
Q73 "AO3401" SOT23-123 16.41,18.595 r270 bottom
Q74 "AO3401" SOT23-123 72.41,9.195 r270 bottom
Q75 "MMBT2222A" SOT23-132 68.199,23.995 r180 bottom value=C1815
Q76 "MMBT2222A" SOT23-132 60.199,23.995 r180 bottom value=C1815
Q77 "MMBT2222A" SOT23-132 52.199,23.995 r180 bottom value=C1815
Q78 "MMBT2222A" SOT23-132 44.199,23.995 r180 bottom value=C1815
Q79 "MMBT2222A" SOT23-132 36.199,26.035 r180 bottom value=C1815
Q80 "MMBT2222A" SOT23-132 28.173,26.035 r180 bottom value=C1815
Q81 "MMBT2222A" SOT23-132 20.199,26.035 r180 bottom value=C1815
Q82 "MMBT2222A" SOT23-132 12.199,23.995 r180 bottom value=C1815
Q83 "MMBT2222A" SOT23-132 68.199,14.595 r180 bottom value=C1815
Q84 "AO3401" SOT23-123 64.41,9.195 r270 bottom
Q85 "AO3401" SOT23-123 56.41,9.195 r270 bottom
Q86 "AO3401" SOT23-123 48.41,9.195 r270 bottom
Q87 "AO3401" SOT23-123 40.767,11.557 r270 bottom
Q88 "AO3401" SOT23-123 32.639,11.587 r270 bottom
Q89 "AO3401" SOT23-123 24.745,11.587 r270 bottom
Q90 "AO3401" SOT23-123 16.41,9.195 r270 bottom
Q93 "MMBT2222A" SOT23-132 60.199,14.595 r180 bottom value=C1815
Q94 "MMBT2222A" SOT23-132 52.199,14.595 r180 bottom value=C1815
Q95 "MMBT2222A" SOT23-132 44.199,14.595 r180 bottom value=C1815
Q96 "MMBT2222A" SOT23-132 36.176,17.187 r180 bottom value=C1815
Q97 "MMBT2222A" SOT23-132 28.173,17.187 r180 bottom value=C1815
Q98 "MMBT2222A" SOT23-132 20.199,17.187 r180 bottom value=C1815
Q99 "MMBT2222A" SOT23-132 12.199,14.595 r180 bottom value=C1815
Q130 "AO3401" SOT23-123 82.17,27.995 r270 bottom
Q131 "AO3401" SOT23-123 82.17,46.796 r270 bottom
Q132 "AO3401" SOT23-123 82.17,37.395 r270 bottom
Q133 "AO3401" SOT23-123 82.17,56.195 r270 bottom
Q134 "MMBT2222A" SOT23-132 77.959,33.395 r180 bottom value=C1815
Q135 "MMBT2222A" SOT23-132 77.959,52.196 r180 bottom value=C1815
Q136 "MMBT2222A" SOT23-132 77.959,42.795 r180 bottom value=C1815
Q137 "MMBT2222A" SOT23-132 77.959,61.595 r180 bottom value=C1815
Q138 "AO3400" SOT23-132 75.184,67.006 r90 bottom
R1 "470K 1%" RES-SMD-0603 14.706,66.929 r90 bottom
R2 "11K 1%" RES-SMD-0603 12.445,66.929 r270 bottom
R3 "47K 1%" RES-SMD-0603 10.185,66.929 r90 bottom
R4 "549R 1%" RES-SMD-0603 19.227,66.929 r90 bottom
R5 "10K 1%" RES-SMD-0603 47.874,70.881 r90 bottom
R6 "1K 1%" RES-SMD-0603 47.874,74.832 r270 bottom
R7 "3.24K 0.1%" RES-SMD-0603 47.874,66.929 r90 bottom
R8 "10K 1%" RES-SMD-0603 82.55,40.509 r0 bottom
R9 "10K 1%" RES-SMD-0603 82.55,59.309 r0 bottom
R10 "10K 1%" RES-SMD-0603 82.55,49.91 r0 bottom
R11 "10K 1%" RES-SMD-0603 82.55,31.109 r0 bottom
R12 "10K 1%" RES-SMD-0603 83.312,33.775 r270 bottom
R13 "10K 1%" RES-SMD-0603 83.312,52.576 r270 bottom
R14 "100R 1%" RES-SMD-0603 61.976,70.484 r0 bottom
R15 "1K 1%" RES-SMD-0603 52.959,68.961 r180 bottom
R16 "10K 1%" RES-SMD-0603 83.312,43.175 r270 bottom
R17 "30R 1%" RES-SMD-1206 54.09,66.511 r180 bottom
R18 "10K 1%" RES-SMD-0603 72.79,59.309 r0 bottom
R19 "10K 1%" RES-SMD-0603 64.79,59.309 r0 bottom
R20 "10K 1%" RES-SMD-0603 56.79,59.309 r0 bottom
R21 "10K 1%" RES-SMD-0603 48.79,59.309 r0 bottom
R22 "10K 1%" RES-SMD-0603 40.79,59.309 r0 bottom
R23 "10K 1%" RES-SMD-0603 32.79,59.309 r0 bottom
R24 "10K 1%" RES-SMD-0603 24.79,59.309 r0 bottom
R25 "10K 1%" RES-SMD-0603 16.79,59.309 r0 bottom
R26 "10K 1%" RES-SMD-0603 72.79,49.909 r0 bottom
R27 "10K 1%" RES-SMD-0603 73.552,61.975 r270 bottom
R28 "10K 1%" RES-SMD-0603 65.552,61.975 r270 bottom
R29 "10K 1%" RES-SMD-0603 57.552,61.975 r270 bottom
R30 "10K 1%" RES-SMD-0603 49.552,61.975 r270 bottom
R31 "10K 1%" RES-SMD-0603 41.552,61.975 r270 bottom
R32 "10K 1%" RES-SMD-0603 33.552,61.975 r270 bottom
R33 "10K 1%" RES-SMD-0603 25.552,61.975 r270 bottom
R34 "10K 1%" RES-SMD-0603 17.552,61.975 r270 bottom
R35 "10K 1%" RES-SMD-0603 73.552,52.575 r270 bottom
R36 "1K 1%" RES-SMD-0603 72.009,61.975 r270 bottom
R37 "1K 1%" RES-SMD-0603 64.009,61.975 r270 bottom
R38 "1K 1%" RES-SMD-0603 56.009,61.975 r270 bottom
R39 "1K 1%" RES-SMD-0603 48.009,61.975 r270 bottom
R40 "1K 1%" RES-SMD-0603 40.009,61.975 r270 bottom
R41 "1K 1%" RES-SMD-0603 32.009,61.975 r270 bottom
R42 "1K 1%" RES-SMD-0603 24.009,61.975 r270 bottom
R43 "1K 1%" RES-SMD-0603 16.009,61.975 r270 bottom
R44 "1K 1%" RES-SMD-0603 72.009,52.575 r270 bottom
R45 "10K 1%" RES-SMD-0603 64.79,40.509 r0 bottom
R46 "10K 1%" RES-SMD-0603 72.79,40.509 r0 bottom
R47 "10K 1%" RES-SMD-0603 16.79,49.909 r0 bottom
R48 "10K 1%" RES-SMD-0603 24.79,49.909 r0 bottom
R49 "10K 1%" RES-SMD-0603 32.79,49.909 r0 bottom
R50 "10K 1%" RES-SMD-0603 40.79,49.909 r0 bottom
R51 "10K 1%" RES-SMD-0603 48.79,49.909 r0 bottom
R52 "10K 1%" RES-SMD-0603 56.79,49.909 r0 bottom
R53 "10K 1%" RES-SMD-0603 64.79,49.909 r0 bottom
R54 "10K 1%" RES-SMD-0603 65.552,43.175 r270 bottom
R55 "10K 1%" RES-SMD-0603 73.552,43.175 r270 bottom
R56 "10K 1%" RES-SMD-0603 17.552,52.575 r270 bottom
R57 "10K 1%" RES-SMD-0603 25.552,52.575 r270 bottom
R58 "10K 1%" RES-SMD-0603 33.552,52.575 r270 bottom
R59 "10K 1%" RES-SMD-0603 41.552,52.575 r270 bottom
R60 "10K 1%" RES-SMD-0603 49.552,52.575 r270 bottom
R61 "10K 1%" RES-SMD-0603 57.552,52.575 r270 bottom
R62 "10K 1%" RES-SMD-0603 65.552,52.575 r270 bottom
R63 "1K 1%" RES-SMD-0603 64.009,43.175 r270 bottom
R64 "1K 1%" RES-SMD-0603 72.009,43.175 r270 bottom
R65 "1K 1%" RES-SMD-0603 16.009,52.575 r270 bottom
R66 "1K 1%" RES-SMD-0603 24.009,52.575 r270 bottom
R67 "1K 1%" RES-SMD-0603 32.009,52.575 r270 bottom
R68 "1K 1%" RES-SMD-0603 40.009,52.575 r270 bottom
R69 "1K 1%" RES-SMD-0603 48.009,52.575 r270 bottom
R70 "1K 1%" RES-SMD-0603 56.009,52.575 r270 bottom
R71 "1K 1%" RES-SMD-0603 64.009,52.575 r270 bottom
R72 "10K 1%" RES-SMD-0603 56.79,40.509 r0 bottom
R73 "10K 1%" RES-SMD-0603 48.79,40.509 r0 bottom
R74 "10K 1%" RES-SMD-0603 41.147,41.021 r0 bottom
R75 "10K 1%" RES-SMD-0603 33.02,41.021 r0 bottom
R76 "10K 1%" RES-SMD-0603 25.125,41.021 r0 bottom
R77 "10K 1%" RES-SMD-0603 16.79,40.509 r0 bottom
R78 "10K 1%" RES-SMD-0603 72.79,31.109 r0 bottom
R79 "10K 1%" RES-SMD-0603 64.79,31.109 r0 bottom
R80 "10K 1%" RES-SMD-0603 56.79,31.109 r0 bottom
R81 "10K 1%" RES-SMD-0603 57.552,43.175 r270 bottom
R82 "10K 1%" RES-SMD-0603 49.552,43.175 r270 bottom
R83 "10K 1%" RES-SMD-0603 41.909,43.683 r270 bottom
R84 "10K 1%" RES-SMD-0603 33.806,43.683 r270 bottom
R85 "10K 1%" RES-SMD-0603 25.887,43.683 r270 bottom
R86 "10K 1%" RES-SMD-0603 17.552,43.175 r270 bottom
R87 "10K 1%" RES-SMD-0603 73.552,33.775 r270 bottom
R88 "10K 1%" RES-SMD-0603 65.552,33.775 r270 bottom
R89 "10K 1%" RES-SMD-0603 57.552,33.775 r270 bottom
R90 "1K 1%" RES-SMD-0603 56.009,43.175 r270 bottom
R91 "1K 1%" RES-SMD-0603 48.009,43.175 r270 bottom
R92 "1K 1%" RES-SMD-0603 40.385,43.683 r270 bottom
R93 "1K 1%" RES-SMD-0603 32.263,43.683 r270 bottom
R94 "1K 1%" RES-SMD-0603 24.318,43.683 r270 bottom
R95 "1K 1%" RES-SMD-0603 16.009,43.175 r270 bottom
R96 "1K 1%" RES-SMD-0603 72.009,33.775 r270 bottom
R97 "1K 1%" RES-SMD-0603 64.009,33.775 r270 bottom
R98 "1K 1%" RES-SMD-0603 56.009,33.775 r270 bottom
R99 "50R 1%" RES-SMD-0603 61.976,75.057 r180 bottom
R100 "10K 1%" RES-SMD-0603 16.79,31.109 r0 bottom
R101 "10K 1%" RES-SMD-0603 25.125,32.385 r0 bottom
R102 "10K 1%" RES-SMD-0603 33.02,32.385 r0 bottom
R103 "10K 1%" RES-SMD-0603 41.147,32.385 r0 bottom
R104 "10K 1%" RES-SMD-0603 48.79,31.109 r0 bottom
R105 "10K 1%" RES-SMD-0603 70.485,61.975 r90 bottom
R106 "10K 1%" RES-SMD-0603 17.552,33.775 r270 bottom
R107 "10K 1%" RES-SMD-0603 25.887,34.791 r270 bottom
R108 "10K 1%" RES-SMD-0603 33.806,34.791 r270 bottom
R109 "10K 1%" RES-SMD-0603 41.909,34.791 r270 bottom
R110 "10K 1%" RES-SMD-0603 49.552,33.775 r270 bottom
R111 "10K 1%" RES-SMD-0603 62.485,61.975 r90 bottom
R112 "1K 1%" RES-SMD-0603 16.009,33.775 r270 bottom
R113 "1K 1%" RES-SMD-0603 24.318,34.791 r270 bottom
R114 "1K 1%" RES-SMD-0603 32.263,34.791 r270 bottom
R115 "1K 1%" RES-SMD-0603 40.385,34.791 r270 bottom
R116 "1K 1%" RES-SMD-0603 48.009,33.775 r270 bottom
R117 "10K 1%" RES-SMD-0603 54.485,61.975 r90 bottom
R118 "10K 1%" RES-SMD-0603 46.485,61.975 r90 bottom
R119 "10K 1%" RES-SMD-0603 38.485,61.975 r90 bottom
R120 "10K 1%" RES-SMD-0603 30.485,61.975 r90 bottom
R121 "10K 1%" RES-SMD-0603 22.485,61.975 r90 bottom
R122 "10K 1%" RES-SMD-0603 14.485,61.975 r90 bottom
R123 "10K 1%" RES-SMD-0603 70.485,52.575 r90 bottom
R124 "10K 1%" RES-SMD-0603 62.485,43.175 r90 bottom
R125 "10K 1%" RES-SMD-0603 70.485,43.175 r90 bottom
R126 "10K 1%" RES-SMD-0603 14.485,52.575 r90 bottom
R127 "10K 1%" RES-SMD-0603 22.485,52.575 r90 bottom
R128 "10K 1%" RES-SMD-0603 30.485,52.575 r90 bottom
R129 "10K 1%" RES-SMD-0603 38.485,52.575 r90 bottom
R130 "10K 1%" RES-SMD-0603 46.485,52.575 r90 bottom
R131 "10K 1%" RES-SMD-0603 54.485,52.575 r90 bottom
R132 "10K 1%" RES-SMD-0603 62.485,52.575 r90 bottom
R133 "10K 1%" RES-SMD-0603 54.485,43.175 r90 bottom
R134 "10K 1%" RES-SMD-0603 46.485,43.175 r90 bottom
R135 "10K 1%" RES-SMD-0603 38.862,43.683 r90 bottom
R136 "10K 1%" RES-SMD-0603 30.739,43.683 r90 bottom
R137 "10K 1%" RES-SMD-0603 22.733,43.683 r90 bottom
R138 "10K 1%" RES-SMD-0603 14.485,43.175 r90 bottom
R139 "10K 1%" RES-SMD-0603 70.485,33.775 r90 bottom
R140 "10K 1%" RES-SMD-0603 62.485,33.775 r90 bottom
R141 "10K 1%" RES-SMD-0603 54.485,33.775 r90 bottom
R142 "10K 1%" RES-SMD-0603 14.485,33.775 r90 bottom
R143 "10K 1%" RES-SMD-0603 22.733,34.791 r90 bottom
R144 "10K 1%" RES-SMD-0603 30.739,34.791 r90 bottom
R145 "10K 1%" RES-SMD-0603 38.862,34.791 r90 bottom
R146 "10K 1%" RES-SMD-0603 46.485,33.775 r90 bottom
R147 "10K 1%" RES-SMD-0603 72.79,21.709 r0 bottom
R148 "10K 1%" RES-SMD-0603 56.79,21.709 r0 bottom
R149 "10K 1%" RES-SMD-0603 33.02,23.495 r0 bottom
R150 "10K 1%" RES-SMD-0603 16.79,21.709 r0 bottom
R151 "10K 1%" RES-SMD-0603 41.147,23.495 r0 bottom
R152 "10K 1%" RES-SMD-0603 64.79,21.709 r0 bottom
R153 "10K 1%" RES-SMD-0603 48.79,21.709 r0 bottom
R154 "10K 1%" RES-SMD-0603 25.125,23.495 r0 bottom
R155 "10K 1%" RES-SMD-0603 72.79,12.309 r0 bottom
R156 "10K 1%" RES-SMD-0603 73.552,24.375 r270 bottom
R157 "10K 1%" RES-SMD-0603 65.552,24.375 r270 bottom
R158 "10K 1%" RES-SMD-0603 57.552,24.375 r270 bottom
R159 "10K 1%" RES-SMD-0603 49.552,24.375 r270 bottom
R160 "10K 1%" RES-SMD-0603 41.909,25.899 r270 bottom
R161 "10K 1%" RES-SMD-0603 33.806,25.899 r270 bottom
R162 "10K 1%" RES-SMD-0603 25.887,25.899 r270 bottom
R163 "10K 1%" RES-SMD-0603 17.552,24.375 r270 bottom
R164 "10K 1%" RES-SMD-0603 73.552,14.975 r270 bottom
R165 "1K 1%" RES-SMD-0603 72.009,24.375 r270 bottom
R166 "1K 1%" RES-SMD-0603 64.009,24.375 r270 bottom
R167 "1K 1%" RES-SMD-0603 56.009,24.375 r270 bottom
R168 "1K 1%" RES-SMD-0603 48.009,24.375 r270 bottom
R169 "1K 1%" RES-SMD-0603 40.385,25.899 r270 bottom
R170 "1K 1%" RES-SMD-0603 32.263,25.899 r270 bottom
R171 "1K 1%" RES-SMD-0603 24.318,25.899 r270 bottom
R172 "1K 1%" RES-SMD-0603 16.009,24.375 r270 bottom
R173 "1K 1%" RES-SMD-0603 72.009,14.975 r270 bottom
R174 "10K 1%" RES-SMD-0603 70.485,24.375 r90 bottom
R175 "10K 1%" RES-SMD-0603 62.485,24.375 r90 bottom
R176 "10K 1%" RES-SMD-0603 54.485,24.375 r90 bottom
R177 "10K 1%" RES-SMD-0603 46.485,24.375 r90 bottom
R178 "10K 1%" RES-SMD-0603 38.862,25.899 r90 bottom
R179 "10K 1%" RES-SMD-0603 30.739,25.899 r90 bottom
R180 "10K 1%" RES-SMD-0603 22.733,25.899 r90 bottom
R181 "10K 1%" RES-SMD-0603 14.485,24.375 r90 bottom
R182 "10K 1%" RES-SMD-0603 70.485,14.975 r90 bottom
R183 "10K 1%" RES-SMD-0603 41.147,14.478 r0 bottom
R184 "10K 1%" RES-SMD-0603 25.125,14.478 r0 bottom
R185 "10K 1%" RES-SMD-0603 72.962,71.844 r180 top
R186 "10K 1%" RES-SMD-0603 16.79,12.309 r0 bottom
R187 "1K 1%" RES-SMD-0603 2.92,25.014 r180 bottom
R188 "10K 1%" RES-SMD-0603 56.79,12.309 r0 bottom
R189 "10K 1%" RES-SMD-0603 33.02,14.478 r0 bottom
R190 "10K 1%" RES-SMD-0603 64.79,12.309 r0 bottom
R191 "10K 1%" RES-SMD-0603 48.79,12.309 r0 bottom
R192 "10K 1%" RES-SMD-0603 65.552,14.975 r270 bottom
R193 "10K 1%" RES-SMD-0603 57.552,14.975 r270 bottom
R194 "10K 1%" RES-SMD-0603 49.552,14.975 r270 bottom
R195 "10K 1%" RES-SMD-0603 41.909,17.187 r270 bottom
R196 "10K 1%" RES-SMD-0603 33.737,17.187 r270 bottom
R197 "10K 1%" RES-SMD-0603 25.887,17.187 r270 bottom
R198 "10K 1%" RES-SMD-0603 17.552,14.975 r270 bottom
R201 "1K 1%" RES-SMD-0603 64.009,14.975 r270 bottom
R202 "1K 1%" RES-SMD-0603 56.009,14.975 r270 bottom
R203 "1K 1%" RES-SMD-0603 48.009,14.975 r270 bottom
R204 "1K 1%" RES-SMD-0603 40.385,17.187 r270 bottom
R205 "1K 1%" RES-SMD-0603 32.195,17.187 r270 bottom
R206 "1K 1%" RES-SMD-0603 24.318,17.187 r270 bottom
R207 "1K 1%" RES-SMD-0603 16.009,14.975 r270 bottom
R210 "10K 1%" RES-SMD-0603 62.485,14.975 r90 bottom
R211 "10K 1%" RES-SMD-0603 54.485,14.975 r90 bottom
R212 "10K 1%" RES-SMD-0603 46.485,14.975 r90 bottom
R213 "10K 1%" RES-SMD-0603 38.862,17.187 r90 bottom
R214 "10K 1%" RES-SMD-0603 30.671,17.187 r90 bottom
R215 "10K 1%" RES-SMD-0603 22.733,17.187 r90 bottom
R216 "10K 1%" RES-SMD-0603 14.485,14.975 r90 bottom
R217 "10K 1%" RES-SMD-0603 23.749,73.533 r270 bottom
R218 "10K 1%" RES-SMD-0603 72.962,74.911 r180 top
R275 "10K 1%" RES-SMD-0603 83.312,61.975 r270 bottom
R276 "1K 1%" RES-SMD-0603 81.769,33.775 r270 bottom
R277 "1K 1%" RES-SMD-0603 81.769,52.576 r270 bottom
R278 "1K 1%" RES-SMD-0603 81.769,43.175 r270 bottom
R279 "1K 1%" RES-SMD-0603 81.769,61.975 r270 bottom
R280 "120R 1%" RES-SMD-0603 5.498,47.498 r0 bottom
R282 "10K 1%" RES-SMD-0603 4.661,29.337 r0 bottom
R283 "10K 1%" RES-SMD-0603 7.785,29.337 r180 bottom
R284 "10K 1%" RES-SMD-0603 7.785,40.386 r180 bottom
R285 "10K 1%" RES-SMD-0603 4.661,40.386 r0 bottom
R286 "22R 1%" RES-SMD-0603 4.661,42.672 r0 bottom
R287 "22R 1%" RES-SMD-0603 4.699,27.178 r180 bottom
R288 "10K 1%" RES-SMD-0603 13.335,81.026 r0 top
R289 "22R 1%" RES-SMD-0603 7.747,27.178 r0 bottom
R290 "22R 1%" RES-SMD-0603 7.785,42.672 r180 bottom
R296 "10K 1%" RES-SMD-0603 80.245,33.775 r90 bottom
R297 "10K 1%" RES-SMD-0603 80.245,52.576 r90 bottom
R298 "10K 1%" RES-SMD-0603 80.245,43.175 r90 bottom
R299 "10K 1%" RES-SMD-0603 80.245,61.975 r90 bottom
R303 "22R 1%" RES-SMD-0603 53.086,4.118 r270 top
R304 "50R 1%" RES-SMD-0603 52.959,79.121 r0 bottom
R305 "50R 1%" RES-SMD-0603 65.687,79.121 r0 bottom
R306 "30R 1%" RES-SMD-1206 67.056,66.511 r180 bottom
R308 "22R 1%" RES-SMD-0603 47.117,4.118 r270 top
R309 "50R 1%" RES-SMD-0603 75.184,75.057 r180 bottom
R310 "10K 1%" RES-SMD-0603 64.008,73.533 r270 top
R311 "100R 1%" RES-SMD-0603 75.184,70.484 r0 bottom
R312 "10K 1%" RES-SMD-0603 13.335,78.867 r180 top
R313 "1K 1%" RES-SMD-0603 28.55,70.612 r90 bottom
R314 "1K 1%" RES-SMD-0603 65.925,68.961 r180 bottom
R316 "10K 1%" RES-SMD-0603 61.722,80.284 r270 top
R319 "22R 1%" RES-SMD-0603 61.722,66.473 r270 top
R322 "10K 1%" RES-SMD-0603 72.962,65.711 r180 top
TVS1 "S2312" SOT23-123 33.613,3.739 r180 top
TVS2 "S2312" SOT23-123 39.116,3.739 r180 top
TVS3 "S2305" SOT23-123 65.302,3.937 r0 top
TVS4 "S2305" SOT23-123 61.552,3.937 r0 top
TVS5 "S2305" SOT23-123 69.052,3.937 r0 top
TVS6 "S2312" SOT23-123 21.844,3.739 r180 top
TVS7 "S2305" SOT23-123 28.109,3.739 r180 top
TVS8 "S2305" SOT23-123 43.688,3.739 r180 top
TVS9 "S2305" SOT23-123 50.05,3.739 r180 top
U1 "TPS5430DDAR" HSOP8 34.798,67.945 r180 bottom
U2 "MCP4902-E/ST" TSSOP14 68.326,74.168 r90 top
U3 "ISO1042BQDWVRQ1" SO8L 5.498,54.991 r270 bottom
U4 "OPA2340UA" SO8 68.44,73.025 r180 bottom value=LM358
U5 "OPA2340UA" SO8 55.474,73.025 r180 bottom value=LM358
U6 "TPL5010DDCR" SOT23-6 66.929,66.548 r180 top
U7 "ATmega2560-AU" TQFP100L 41,73.406 r90 top
U8 "TPS259470LRPWR" TPS259470 16.387,72.771 r0 bottom
U9 "ADUM1250" SO8 6.223,34.925 r270 bottom
U10 "MCP2515" TSSOP20 15.24,73.152 r0 top
X1 "8MHz" XT4-16.000MHz-4_V 15.268,66.551 r180 top value=4Mhz
X2 "8MHz" XT4-16.000MHz-4_V 57.862,73.279 r90 top value=4Mhz

## Footprints (in the part's own frame and the unit in brackets; to place one, negate y for a bottom-side part, rotate by r counter-clockwise, add the part's x,y. Pads: shape width x height; smd on the part's side, far side on the other; paste and mask are expansions set on the pad)
0532610371 [mm]
  rect 0.8x1.6 smd: 1(-1.25,2.9) 2(0,2.9) 3(1.25,2.9)
  rect 2.1x3 smd: SH1(-3.8,0) SH2(3.8,0)
  silkscreen extent -2.75,-2.1 2.75,3.5, body extent -4.45,-2.12 4.45,3.08, height 3.4
0532610771 [mm]
  rect 0.8x1.6 smd mask+0.076: 1(-3.75,2.4) 2(-2.5,2.4) 3(-1.25,2.4) 4(0,2.4) 5(1.25,2.4) 6(2.5,2.4) 7(3.75,2.4)
  rect 2.1x3 smd mask+0.076: S1(-6.3,-0.5) S2(6.3,-0.5)
  silkscreen extent -6.95,-2.6 6.95,4.11, body extent -6.95,-2.63 6.95,2.57, height 3.4
DIO-SMD-A [mil]
  rect 90x90.55 smd: 1(75,5) 2(-85,5)
  silkscreen extent -135,-50 130,60, body extent -104,-45 101,57, height 95
"FER 0805/2012" [mm] "Chip Ferrite, 2-Leads, Body 2.00x1.20mm, IPC Medium Density"
  rect 1.3x1.4 smd: 1(-0.8,0) 2(0.8,0)
  silkscreen extent -1.7,-0.9 1.7,0.9, body extent -1,-0.64 1,0.64, height 1.26
GREENLED_0603 [mm]
  rect 0.4x0.85 smd: 1(-0.8,0) 2(0.8,0)
  silkscreen extent -1.21,-0.6 1.21,0.61, body extent -0.8,-0.4 0.8,0.4, height 0.8
HSOP8 [mm] "SOIC, 8-Leads, Body 4.9x3.9mm, Pitch 1.27mm, IPC High Density"
  oval 1.8x0.6 smd: 1(-2.825,1.905) 2(-2.825,0.635) 3(-2.825,-0.635) 4(-2.825,-1.905) 5(2.825,-1.905) 6(2.825,-0.635) 7(2.825,0.635) 8(2.825,1.905)
  rect 2.3x2.8 smd: 9(0,0)
  silkscreen extent -2.95,-2.55 1.68,2.98, body extent -2.99,-2.45 3,2.45, height 1.6
LASER [mm]
  round 0.7 hole 0.55 mask+0.102: 1(0,1) 3(0,-1)
  round 0.7 hole 0.55: 2(-1,0)
  body extent -2.76,-2.78 2.8,2.77, height 3.7
M3 [mil]
  round 60 hole 30: 1(-90,0) 1(-63.64,-63.64) 1(-63.64,63.64) 1(0,-90) 1(0,90) 1(63.64,-63.64) 1(63.64,63.64) 1(90,0)
  round 250 hole 125.2: 1(0,0)
  silkscreen extent -146,-146 146,146
M30-6000846 [mm]
  rect 0.7x1.8 smd: 1(-4.375,-2.7) 2(-3.125,-2.7) 3(-1.875,-2.7) 4(-0.625,-2.7) 5(0.625,-2.7) 6(1.875,-2.7) 7(3.125,-2.7) 8(4.375,-2.7)
  rect 1x1.5 smd paste-2 mask+0: SH1(-6.625,0) SH2(6.625,0)
  round 0.95 hole 0.95 unplated: ""(-5.425,1.3) ""(5.425,1.3)
  Top Layer region: -5.859,1.095 -5.858,1.093 -5.857,1.09 -5.856,1.088 -5.855,1.086 -5.853,1.084 -5.852,1.081 -5.851,1.079 -5.85,1.077 -5.849,1.075 -5.848,1.072 -5.846,1.07 -5.845,1.068 -5.844,1.066 -5.843,1.064 -5.842,1.061 -5.84,1.059 -5.839,1.057 -5.838,1.055 -5.836,1.053 -5.835,1.051 -5.834,1.048 -5.833,1.046 -5.831,1.044 -5.83,1.042 -5.828,1.04 -5.827,1.038 -5.826,1.036 -5.824,1.034 -5.825,1.035 -5.825,-1.1 -7.425,-1.1 -7.425,1.1 -5.861,1.1
  Top Layer region: 7.425,-1.1 5.825,-1.1 5.825,1.035 5.824,1.033 5.825,1.035 5.825,1.035 5.826,1.036 5.827,1.038 5.828,1.04 5.83,1.042 5.831,1.044 5.832,1.046 5.834,1.048 5.835,1.05 5.836,1.053 5.838,1.055 5.839,1.057 5.84,1.059 5.841,1.061 5.843,1.063 5.844,1.066 5.845,1.068 5.846,1.07 5.847,1.072 5.849,1.074 5.85,1.077 5.851,1.079 5.852,1.081 5.853,1.083 5.854,1.086 5.856,1.088 5.857,1.09 5.858,1.092 5.859,1.095 5.861,1.1 7.425,1.1
  silkscreen extent -4.47,-4.25 -4.28,-4.05, body extent -7.37,-3.19 7.37,1.85, height 4.8
M55-6001242R [mm]
  rrect50% 0.8x2.6 smd: 1(-3.175,2.335) 2(-1.905,2.335) 3(-0.635,2.335) 4(0.635,2.335) 5(1.905,2.335) 6(3.175,2.335) 7(3.175,-2.335) 8(1.905,-2.335) 9(0.635,-2.335) 10(-0.635,-2.335) 11(-1.905,-2.335) 12(-3.175,-2.335)
  rrect50% 1.2x2.5 smd: ""(-5.67,-2.6) ""(-5.67,2.6) ""(5.67,-2.6) ""(5.67,2.6)
  oval 0.95x1.7 hole 0.95 slot 1.7 at 90 deg unplated: ""(-5.35,0)
  round 1.6 hole 1.6 unplated: ""(5.35,0)
  silkscreen extent -6.59,-4.05 6.61,4.05, body extent -6.35,-3.6 6.35,3.6, height 6.2
REDLED_0603 [mm]
  rect 0.4x0.85 smd: 1(-0.8,0) 2(0.8,0)
  silkscreen extent -1.21,-0.6 1.21,0.61, body extent -0.8,-0.4 0.8,0.4, height 0.8
RES-SMD-0603 [mm]
  rect 0.6x0.9 smd: 1(-0.889,0) 2(0.927,0)
  silkscreen extent -1.4,-0.64 1.4,0.64, body extent -0.8,-0.4 0.8,0.4, height 0.43
RES-SMD-1206 [mm]
  rect 1.27x0.4 smd: 1(-1.651,0) 2(1.651,0)
  silkscreen extent -2.51,-0.97 2.51,0.99, body extent -1.6,-0.8 1.6,0.8, height 1.02
SM-0603 [mm]
  rect 0.9x0.8 smd: 1(-0.9,0) 2(0.9,0)
  silkscreen extent -1.56,-0.61 1.56,0.61, body extent -0.81,-0.4 0.79,0.4, height 0.5
SO8 [mm] "SOIC, 8-Leads, Body 4.9x3.9mm, Pitch 1.27mm, IPC High Density"
  oval 1.8x0.6 smd: 1(-2.825,1.905) 2(-2.825,0.635) 3(-2.825,-0.635) 4(-2.825,-1.905) 5(2.825,-1.905) 6(2.825,-0.635) 7(2.825,0.635) 8(2.825,1.905)
  silkscreen extent -2.95,-2.55 1.68,2.98, body extent -2.99,-2.45 3,2.45, height 1.6
SO8L [mm] "SOIC, 8-Leads, Body 7.50x7.50mm, Pitch 1.27mm, IPC Medium Density"
  oval 2.1x0.65 smd: 1(-4.675,1.905) 2(-4.675,0.635) 3(-4.675,-0.635) 4(-4.675,-1.905) 5(4.675,-1.905) 6(4.675,-0.635) 7(4.675,0.635) 8(4.675,1.905)
  silkscreen extent -4.8,-3.75 3.35,3.75, body extent -5,-3.65 5,3.65, height 1.5
SOD23 [mm]
  rect 0.91x1.22 smd: 1(0.016,0) 2(3.286,0)
  silkscreen extent -0.76,-1.02 4.06,1.02, body extent -0.22,-0.85 3.53,0.85, height 1.2
SOT23-6 [mil]
  oct 40x20 smd: 1(-59.41,32.4)
  oval 40x20 smd: 2(-59.41,-4.6) 3(-59.41,-42.6) 4(50.59,-42.6) 5(50,-5) 6(50.59,32.4)
  silkscreen extent -89,-68 81,57, body extent -64,-64 54,54, height 51
SOT23-123 [mm] "SOT23, 1=bottom-left, 2=top, 3=bottom-right"
  rect 0.9x0.95 smd: 1(-0.95,-1.25) 2(0,1.25)
  rect 0.9x0.95 smd mask+0: 3(0.95,-1.25)
  silkscreen extent -1.3,-0.38 1.3,1.25, body extent -1.52,-1.23 1.48,1.27, height 1.06
SOT23-132 [mm]
  rect 0.9x0.95 smd: 1(-0.95,-1.25) 3(0,1.25)
  rect 0.9x0.95 smd mask+0: 2(0.95,-1.25)
  silkscreen extent -1.3,-0.38 1.3,1.25, body extent -1.52,-1.23 1.48,1.27, height 1.06
SRP7050TA [mm] "Precision Wire Wound Inductor, 2-Leads, Body 7.30x6.60mm, IPC Medium Density"
  rect 3.3x3.15 smd: 1(-2.75,0) 2(2.75,0)
  silkscreen extent -3.8,-3.45 3.8,3.45, body extent -3.6,-3.3 3.6,3.3, height 4.91
"TANT 2312" [mm]
  rect 2.2x2.5 smd paste+0 mask+0: 1(-2.172,0) 2(2.172,0)
  silkscreen extent -3.12,-1.73 3.12,1.73, body extent -3.15,-1.75 3.15,1.75, height 2.79
TPS259470 [mm]
  rrect37% 0.6x0.3 smd paste-1 mask+0: 1(-0.9,0.7) 4(-0.9,-0.7) 7(0.9,-0.7) 10(0.9,0.7)
  rrect37% 0.6x0.25 smd mask+0: 2(-0.9,0.225) 3(-0.9,-0.225) 8(0.9,-0.225) 9(0.9,0.225)
  rrect37% 0.3x2.4 smd paste-2 mask+0: 5(-0.25,0) 6(0.25,0)
  Top Layer region: 157 vertices and 0 holes, not listed, extent -1.2,-1.2 -0.6,-0.55
  Top Layer region: 157 vertices and 0 holes, not listed, extent -1.2,0.55 -0.6,1.2
  Top Layer region: 157 vertices and 0 holes, not listed, extent 0.6,0.55 1.2,1.2
  Top Layer region: 157 vertices and 0 holes, not listed, extent 0.6,-1.2 1.2,-0.55
  silkscreen extent -2,0.6 -1.8,0.8, body extent -1,-1 1,1, height 1
TQFP100L [mm] "TQFP, 100-Leads, Body 14.00x14.00mm, Pitch 0.50mm, IPC High Density"
  oval 1.2x0.25 smd: 1(-7.6,6) 2(-7.6,5.5) 3(-7.6,5) 4(-7.6,4.5) 5(-7.6,4) 6(-7.6,3.5) 7(-7.6,3) 8(-7.6,2.5) 9(-7.6,2) 10(-7.6,1.5) 11(-7.6,1) 12(-7.6,0.5) 13(-7.6,0) 14(-7.6,-0.5) 15(-7.6,-1) 16(-7.6,-1.5) 17(-7.6,-2) 18(-7.6,-2.5) 19(-7.6,-3) 20(-7.6,-3.5) 21(-7.6,-4) 22(-7.6,-4.5) 23(-7.6,-5) 24(-7.6,-5.5) 25(-7.6,-6) 51(7.6,-6) 52(7.6,-5.5) 53(7.6,-5) 54(7.6,-4.5) 55(7.6,-4) 56(7.6,-3.5) 57(7.6,-3) 58(7.6,-2.5) 59(7.6,-2) 60(7.6,-1.5) 61(7.6,-1) 62(7.6,-0.5) 63(7.6,0) 64(7.6,0.5) 65(7.6,1) 66(7.6,1.5) 67(7.6,2) 68(7.6,2.5) 69(7.6,3) 70(7.6,3.5) 71(7.6,4) 72(7.6,4.5) 73(7.6,5) 74(7.6,5.5) 75(7.6,6)
  oval 0.25x1.2 smd: 26(-6,-7.6) 27(-5.5,-7.6) 28(-5,-7.6) 29(-4.5,-7.6) 30(-4,-7.6) 31(-3.5,-7.6) 32(-3,-7.6) 33(-2.5,-7.6) 34(-2,-7.6) 35(-1.5,-7.6) 36(-1,-7.6) 37(-0.5,-7.6) 38(0,-7.6) 39(0.5,-7.6) 40(1,-7.6) 41(1.5,-7.6) 42(2,-7.6) 43(2.5,-7.6) 44(3,-7.6) 45(3.5,-7.6) 46(4,-7.6) 47(4.5,-7.6) 48(5,-7.6) 49(5.5,-7.6) 50(6,-7.6) 76(6,7.6) 77(5.5,7.6) 78(5,7.6) 79(4.5,7.6) 80(4,7.6) 81(3.5,7.6) 82(3,7.6) 83(2.5,7.6) 84(2,7.6) 85(1.5,7.6) 86(1,7.6) 87(0.5,7.6) 88(0,7.6) 89(-0.5,7.6) 90(-1,7.6) 91(-1.5,7.6) 92(-2,7.6) 93(-2.5,7.6) 94(-3,7.6) 95(-3.5,7.6) 96(-4,7.6) 97(-4.5,7.6) 98(-5,7.6) 99(-5.5,7.6) 100(-6,7.6)
  silkscreen extent -7.72,-6.6 6.6,6.8, body extent -8,-8 8,8, height 1.2
TSSOP14 [mm] "TSSOP, 14-Leads, Body 5.00x4.40mm, Pitch 0.65mm, IPC High Density"
  oval 1.25x0.35 smd: 1(-2.825,1.95) 2(-2.825,1.3) 3(-2.825,0.65) 4(-2.825,0) 5(-2.825,-0.65) 6(-2.825,-1.3) 7(-2.825,-1.95) 8(2.825,-1.95) 9(2.825,-1.3) 10(2.825,-0.65) 11(2.825,0) 12(2.825,0.65) 13(2.825,1.3) 14(2.825,1.95)
  silkscreen extent -2.95,-2.5 1.8,2.8, body extent -3.23,-2.55 3.23,2.55, height 1.25
TSSOP20 [mm] "Shrink Small Outline; 20 Leads; Body Width 4.4 mm; Pitch 0.65 mm"
  rect 0.3x1.6 smd: 1(-2.925,-2.75) 2(-2.275,-2.75) 3(-1.625,-2.75) 4(-0.975,-2.75) 5(-0.325,-2.75) 6(0.325,-2.75) 7(0.975,-2.75) 8(1.625,-2.75) 9(2.275,-2.75) 10(2.925,-2.75) 11(2.925,2.75) 12(2.275,2.75) 13(1.625,2.75) 14(0.975,2.75) 15(0.325,2.75) 16(-0.325,2.75) 17(-0.975,2.75) 18(-1.625,2.75) 19(-2.275,2.75) 20(-2.925,2.75)
  silkscreen extent -3.75,-2.87 3.3,1.55, body extent -3.3,-3.3 3.3,3.3, height 1.12
XT4-16.000MHz-4_V [mm] "Hand Drawn, 4-Leads, Body 3.2x2.5 mm"
  rect 1.4x1.2 smd: 1(-1.1,-0.8) 2(1.1,-0.8) 3(1.1,0.8) 4(-1.1,0.8)
  silkscreen extent -2.48,-0.92 -2.23,-0.68, body extent -1.6,-1.25 1.6,1.25, height 0.82